# Altium PCB MB1189.PcbDoc (part 1 of 3)
Units mil, origin at the board's own origin, x right, y up, seen from the top; angles counter-clockwise.
Board outline 3826.77 x 2234.25 mil, 6 copper layers (Top Layer, GND_TOP, Internal Signal 1, VCC, Internal Signal 2, Bottom Layer), stack 62.65 mil thick; 150 components, 157 nets, 740 pads, 457 vias.
Unrouted connection lines stored in the file: 6.
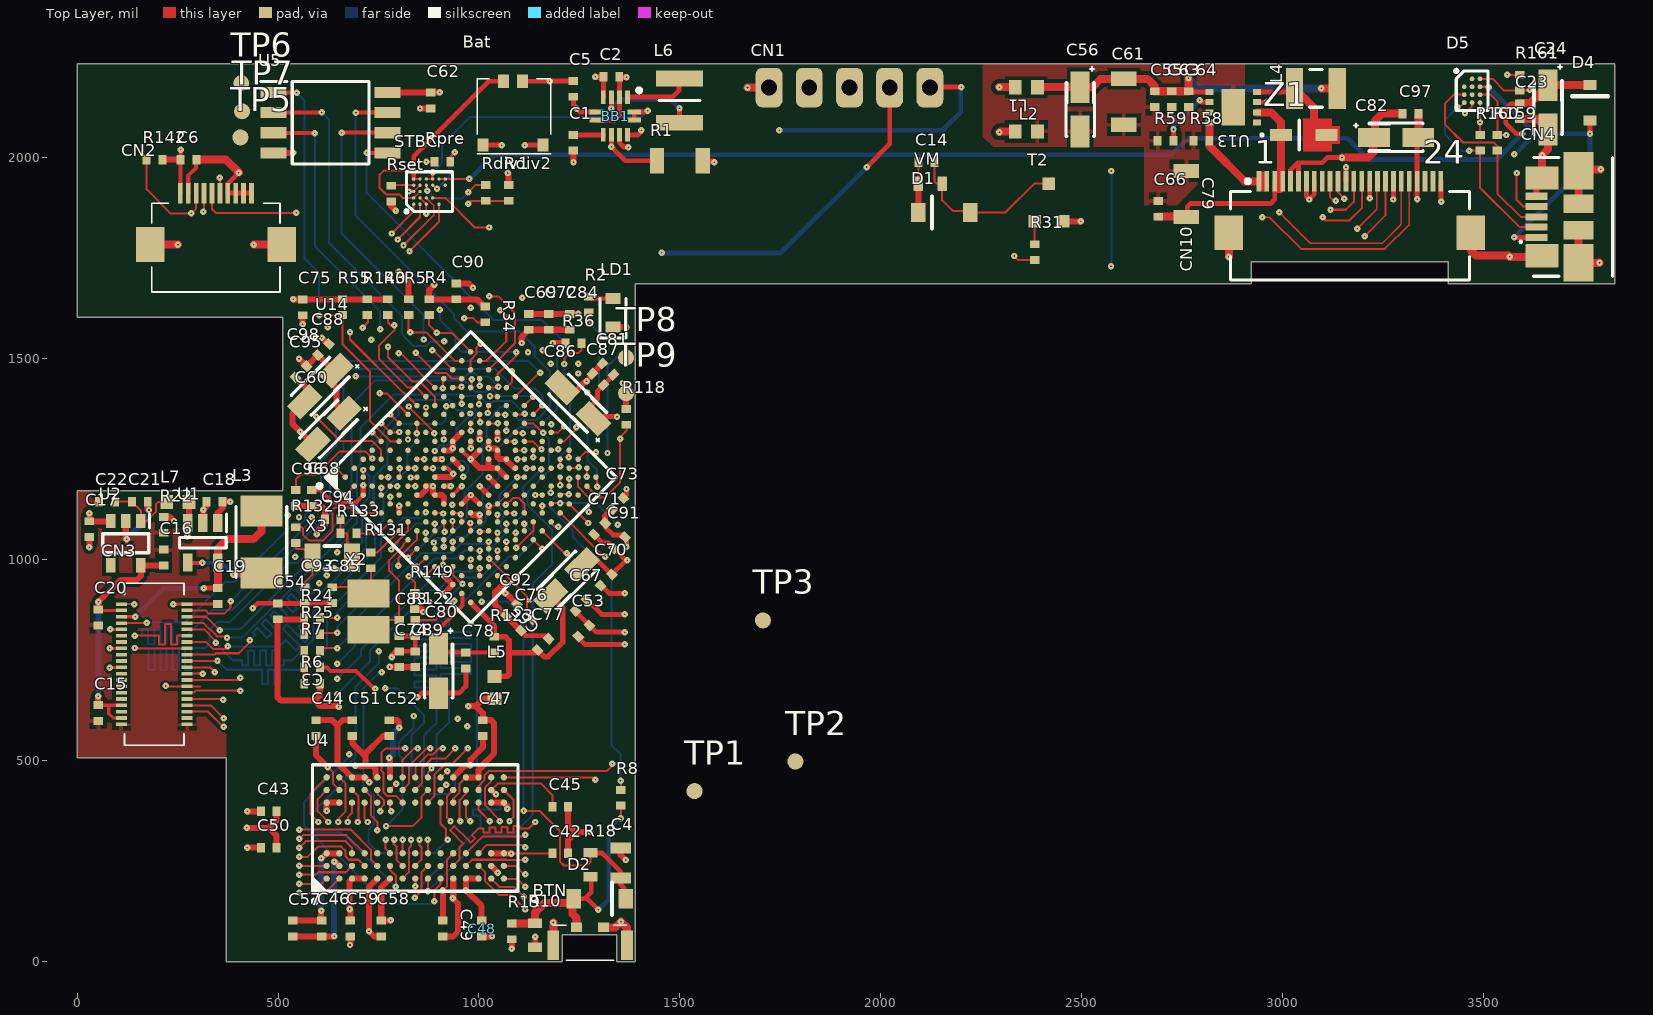
[diagram p0: Top Layer view]
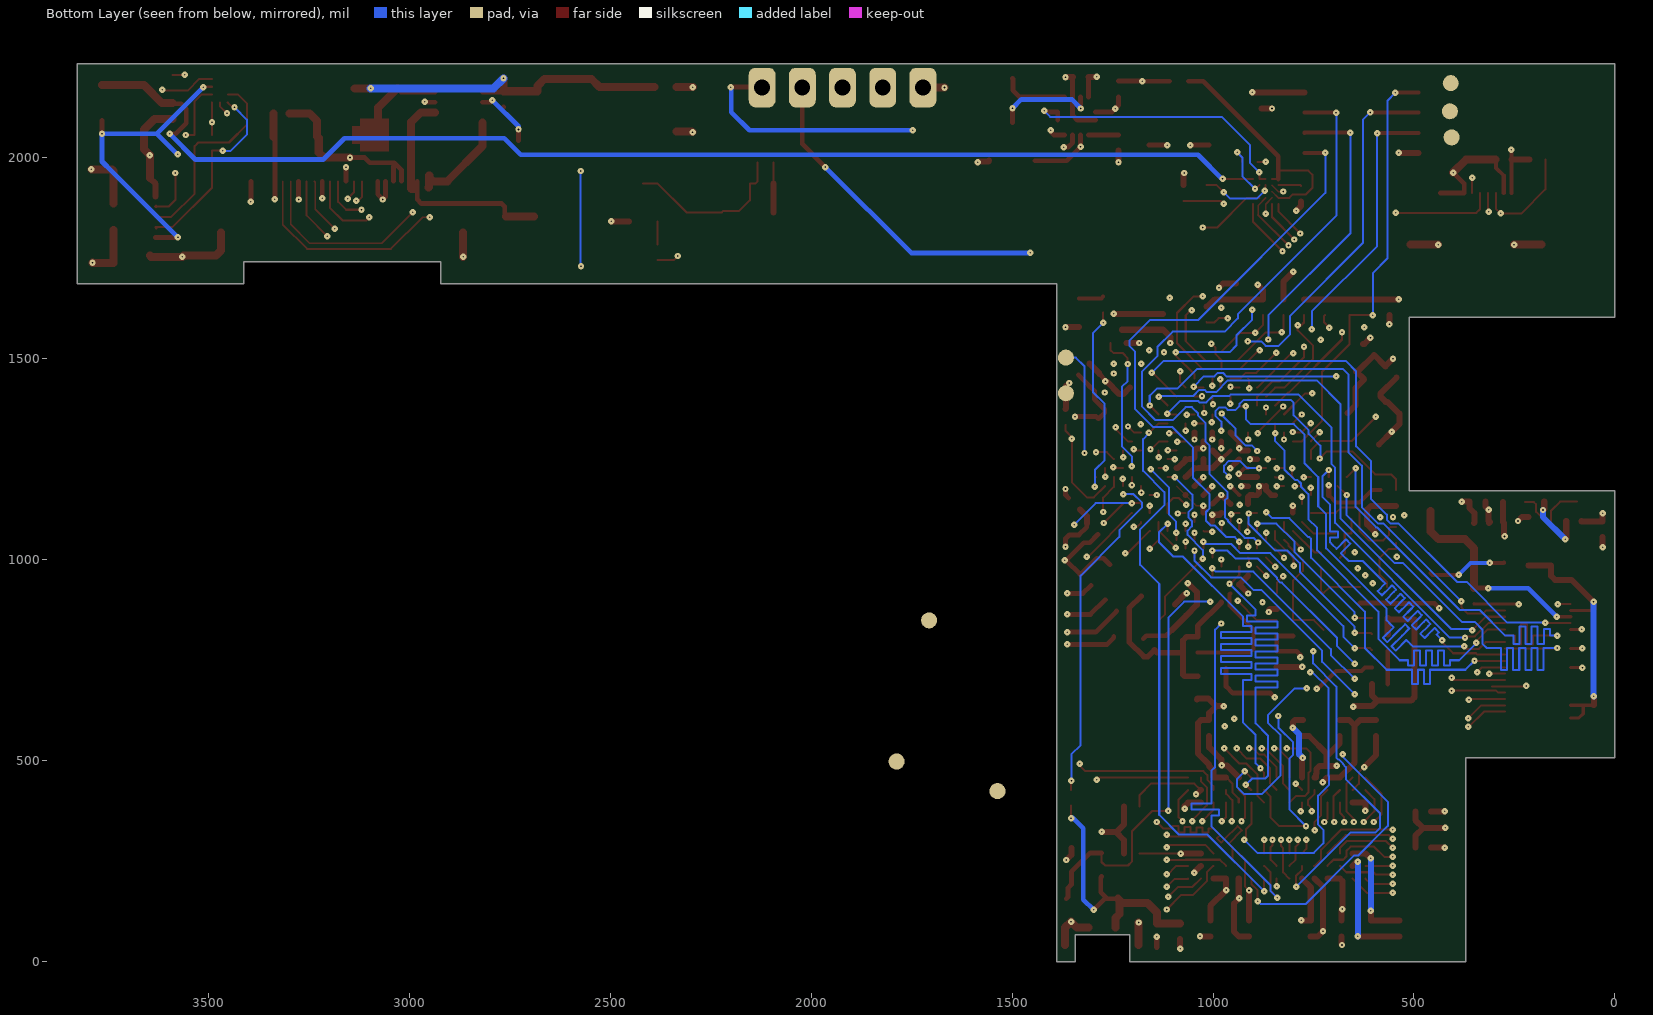
[diagram p1: Bottom Layer view, seen from below]
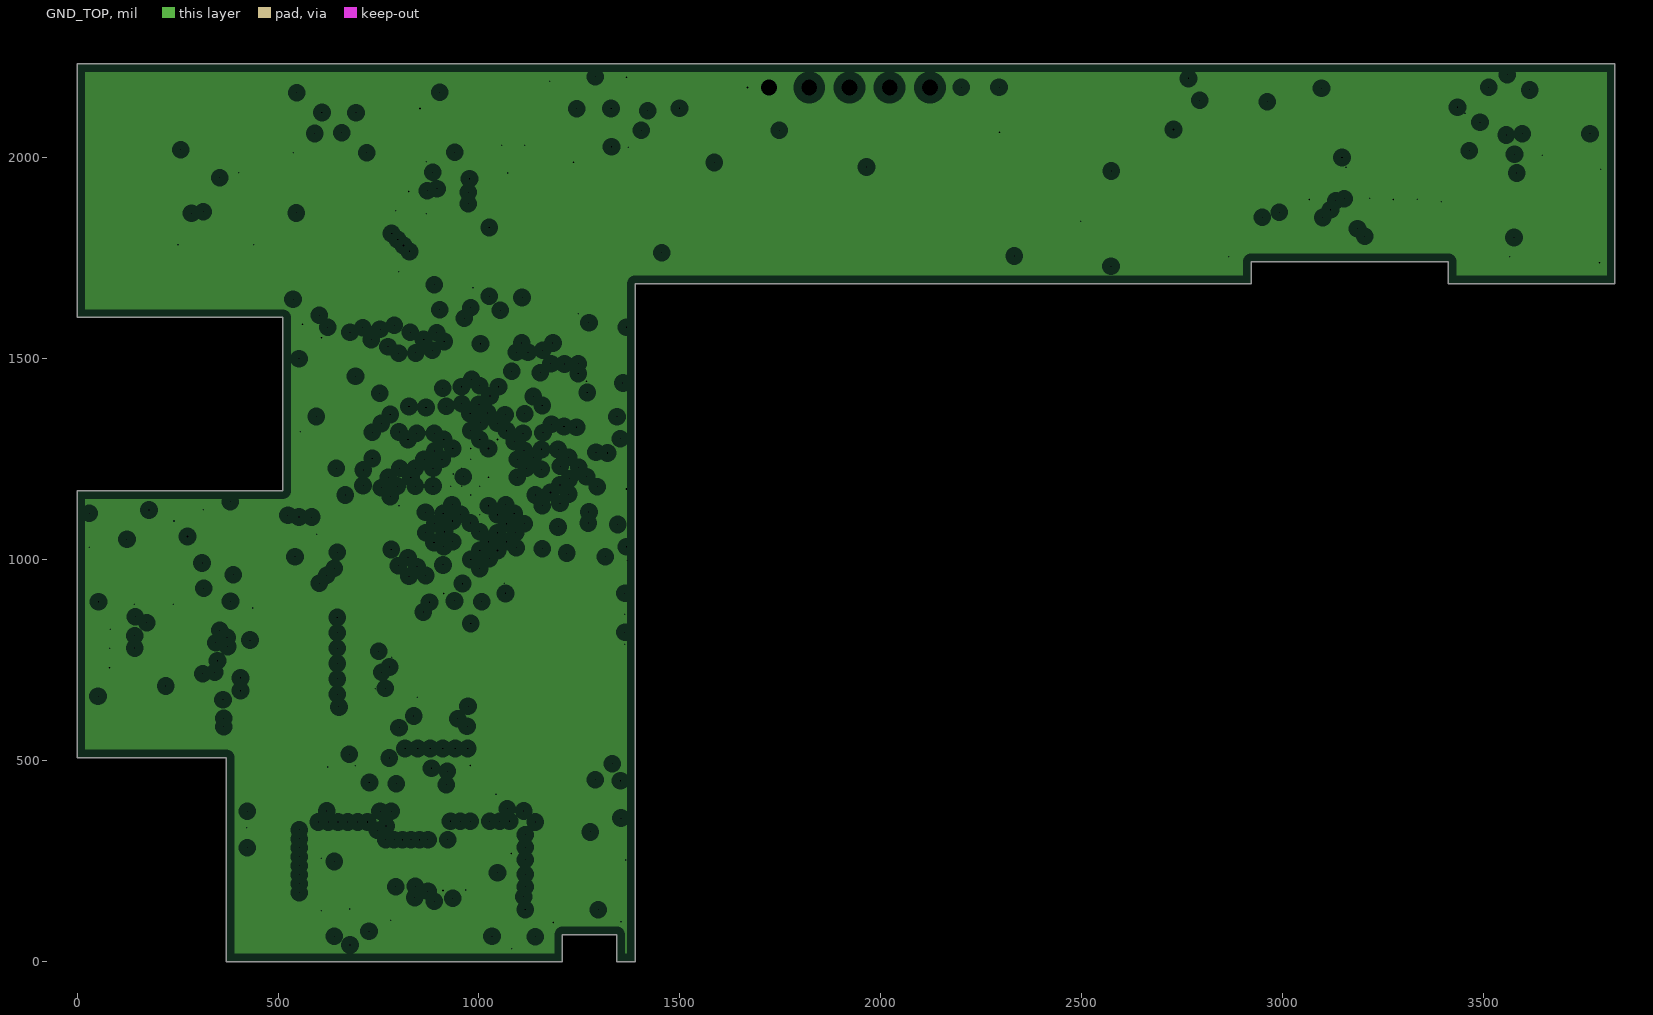
[diagram p2: GND_TOP, clearances drawn from the general rule]
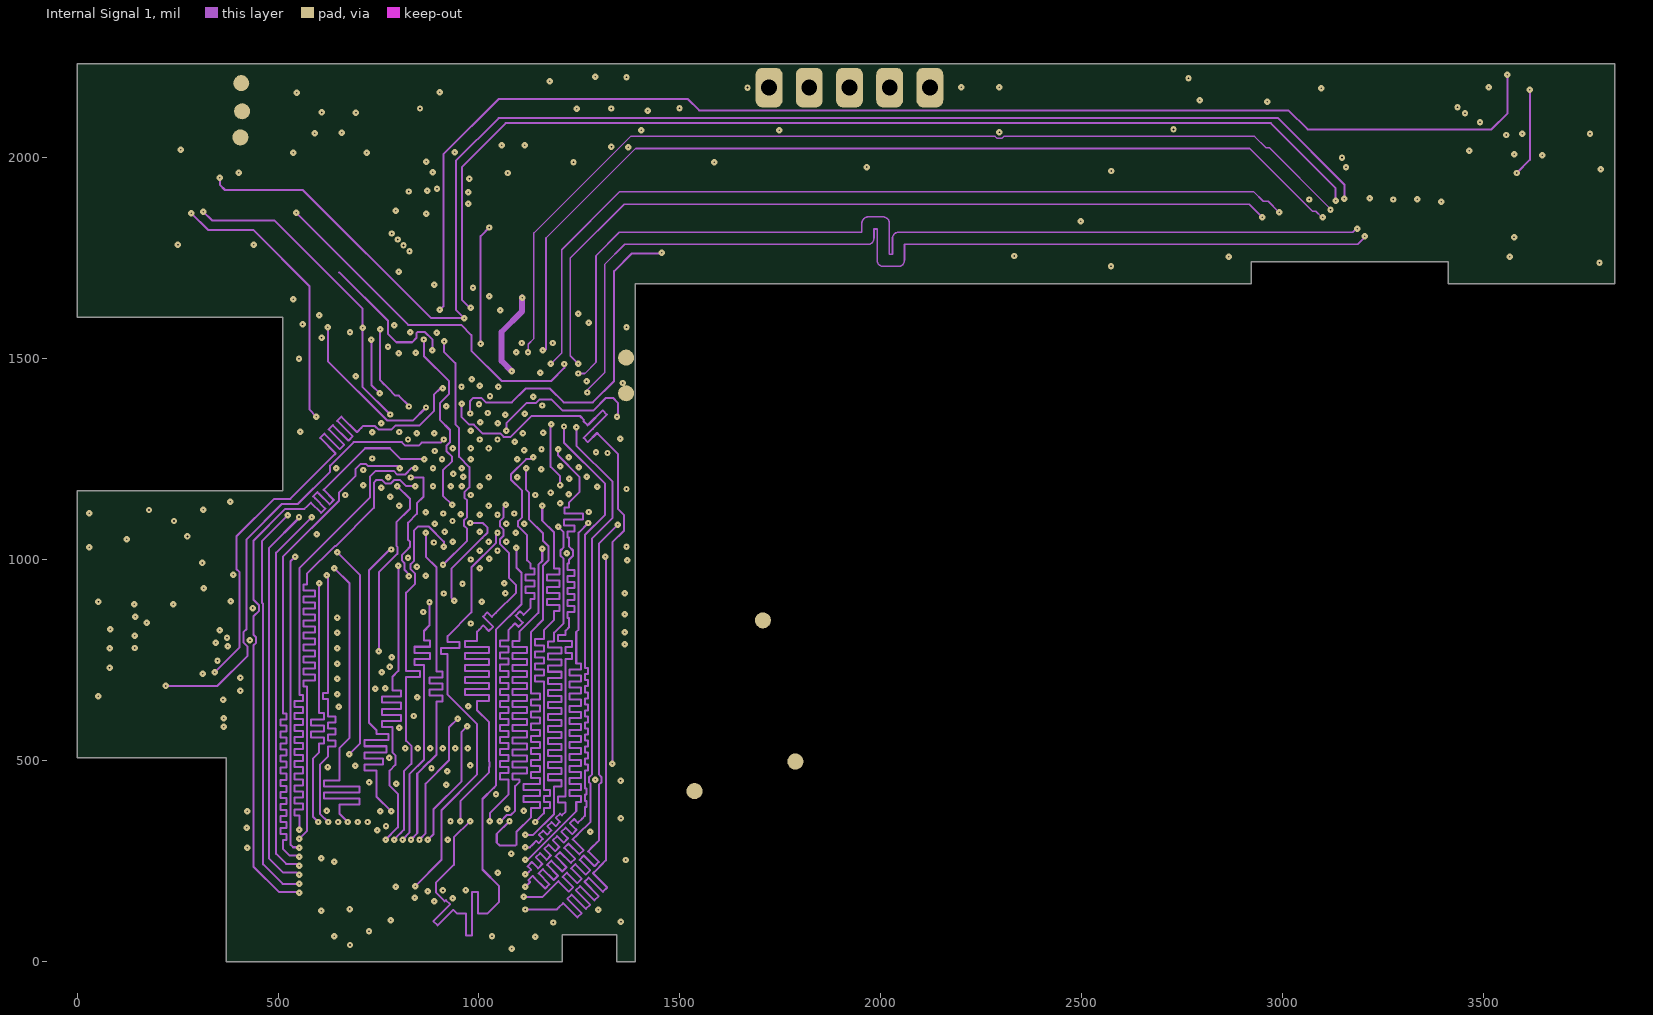
[diagram p3: Internal Signal 1]
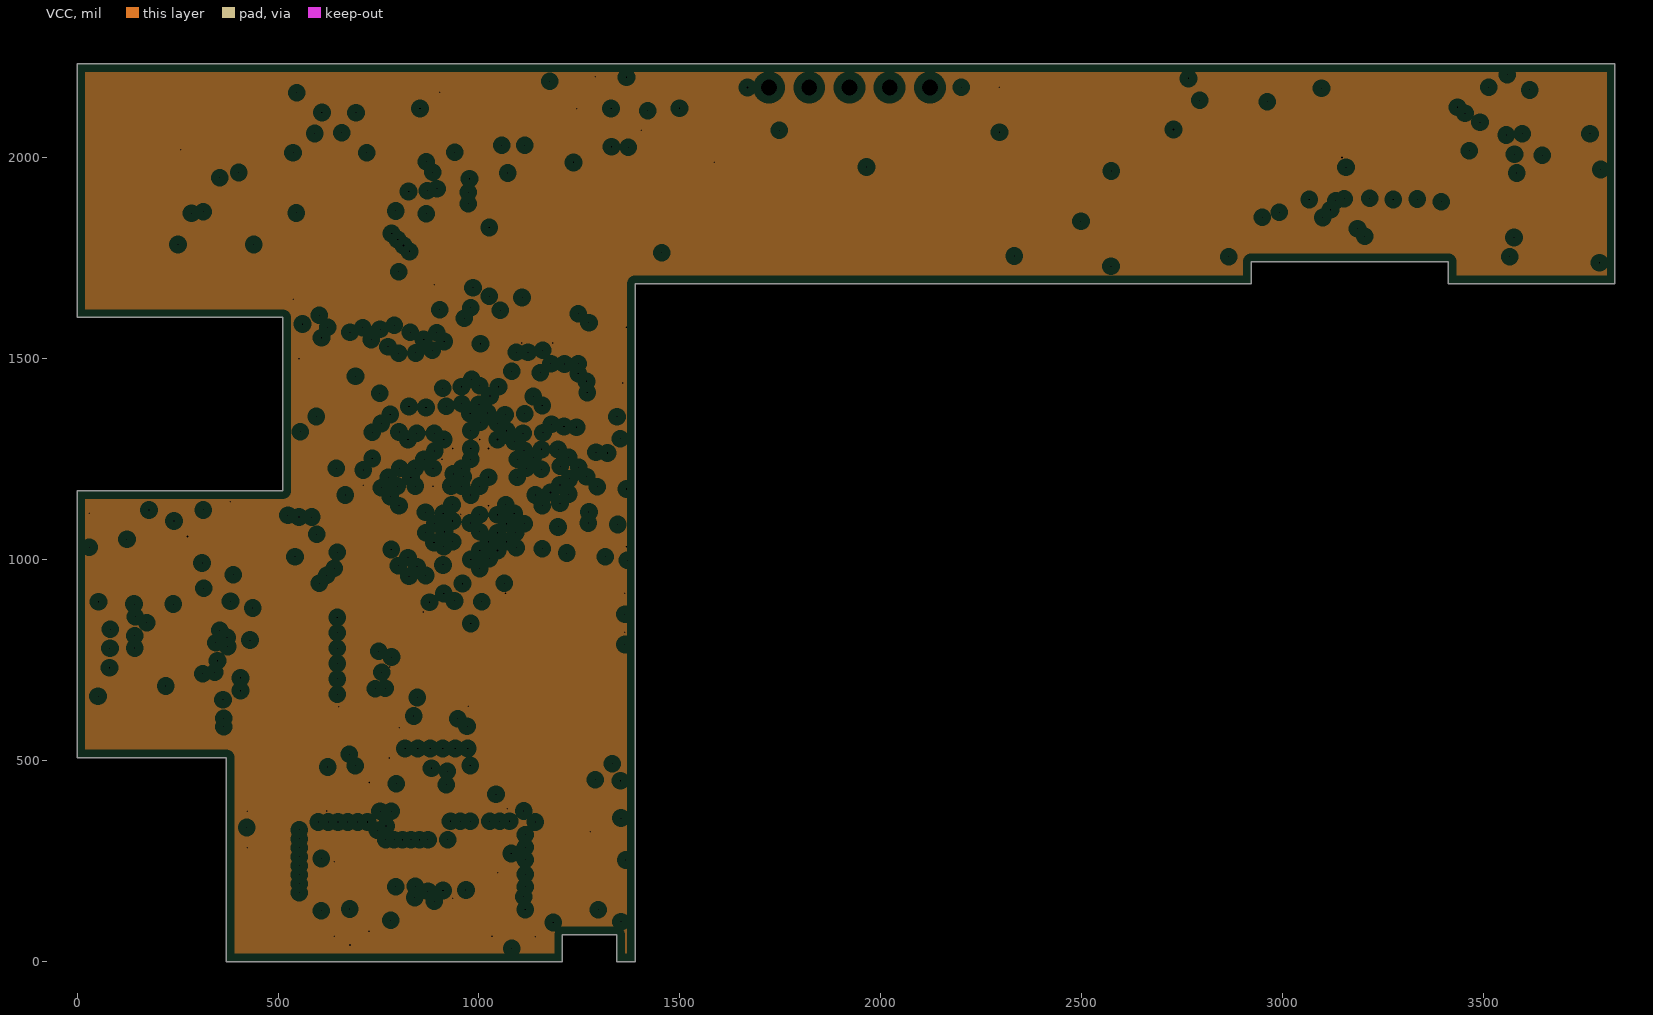
[diagram p4: VCC, clearances drawn from the general rule]
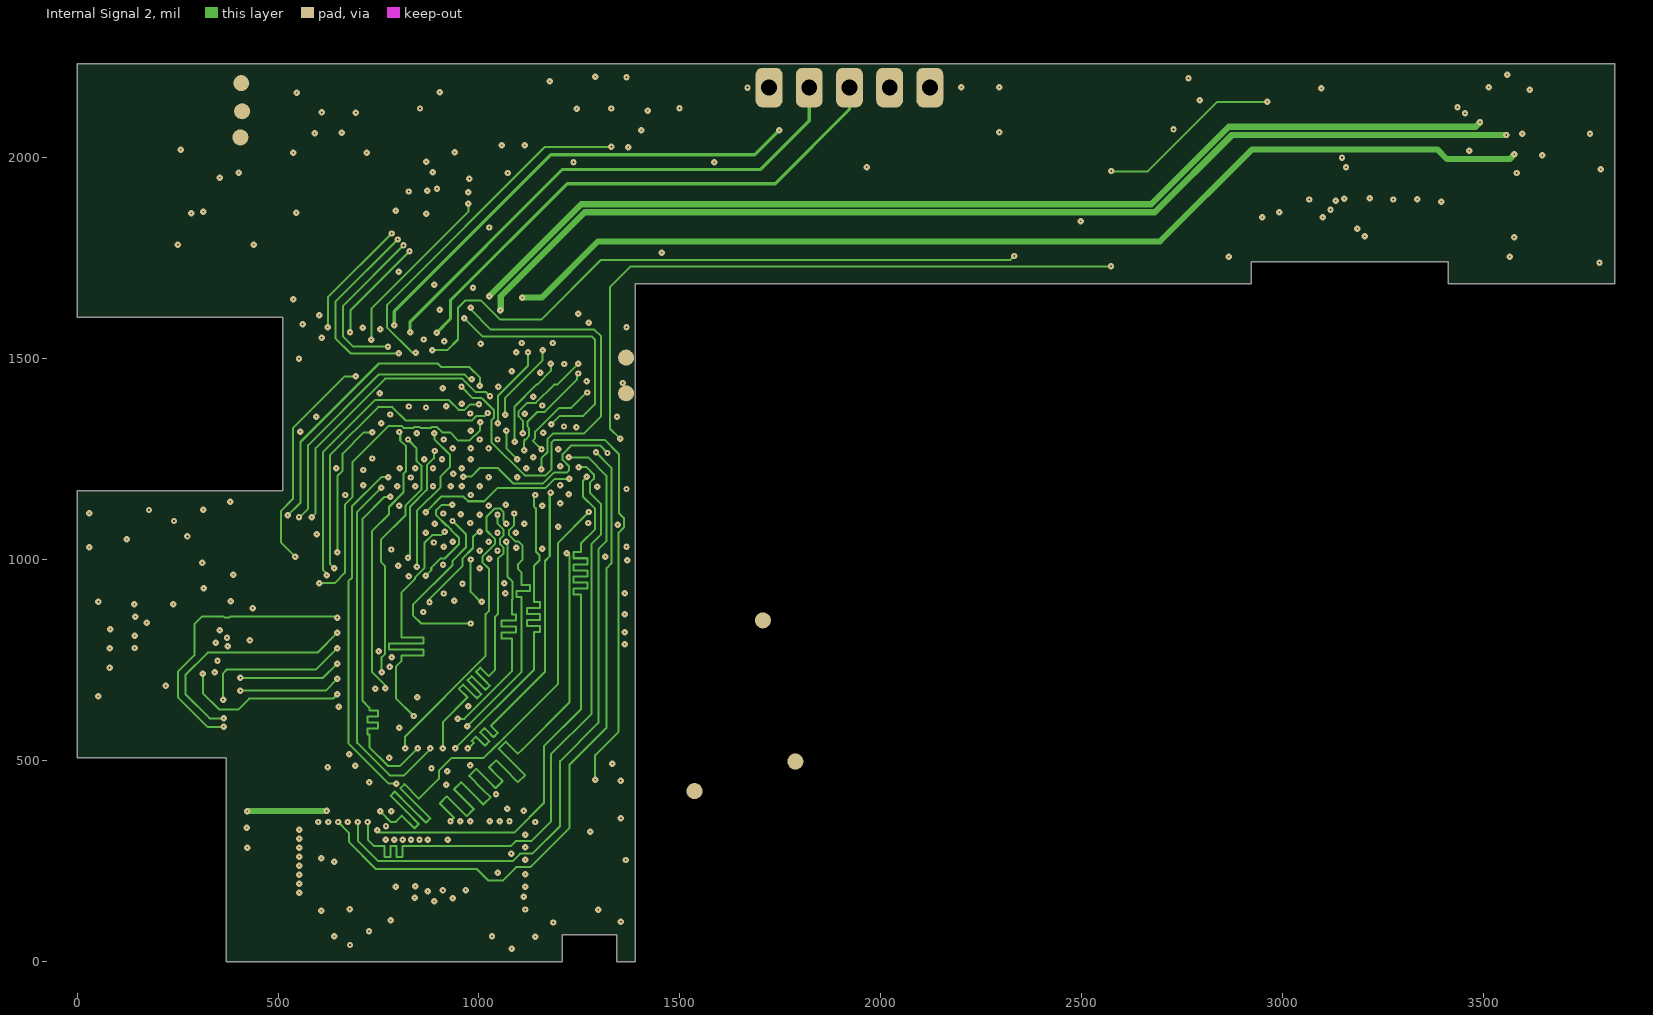
[diagram p5: Internal Signal 2]
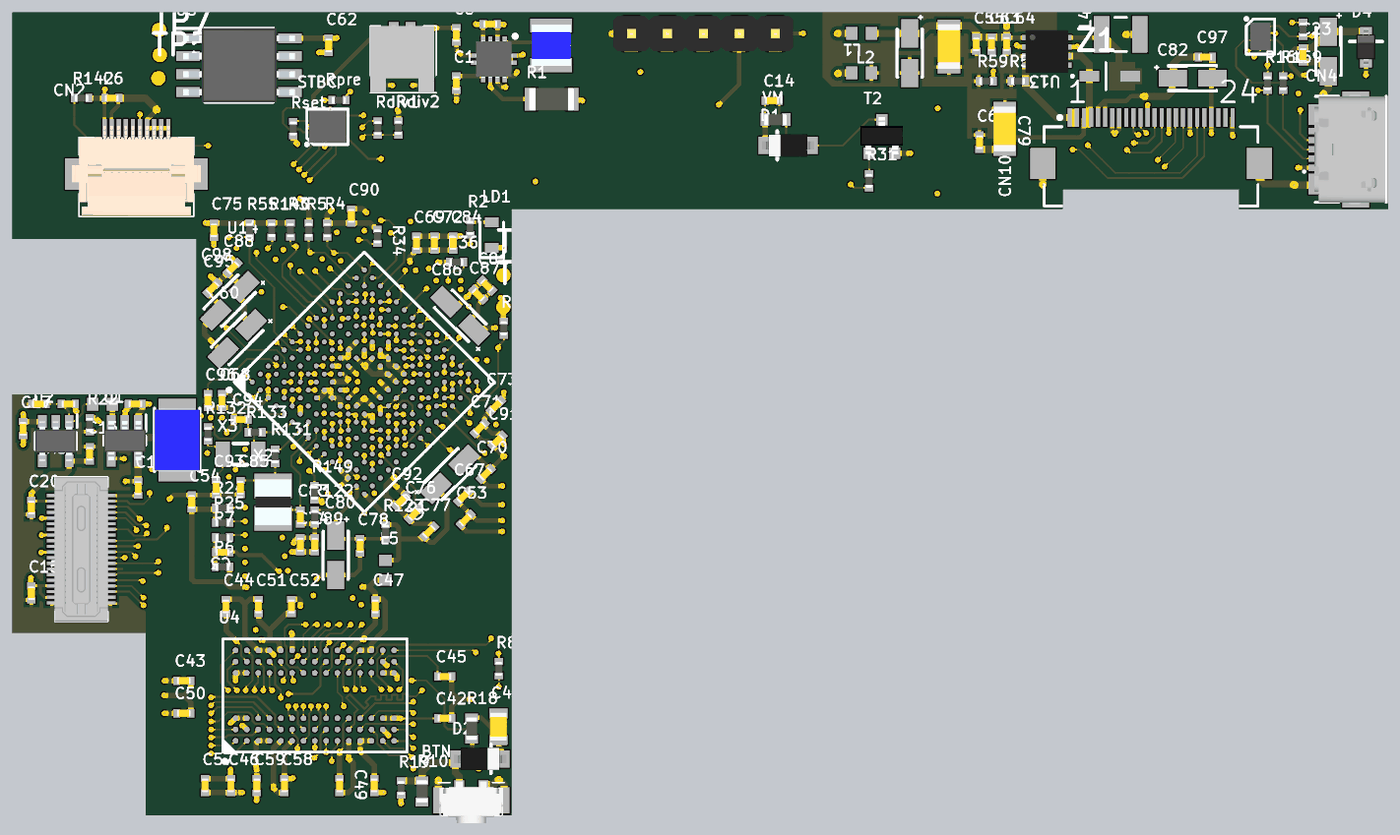
[diagram p8: 3D render of the assembled board from above, using the file's embedded part models]

## Layer stack, top to bottom
Top Solder: solder mask 0.4, Solder Resist, Dk 3.5
Top Layer: signal copper 0.685
Dielectric 1: prepreg 3.9, Dk 4.2
GND_TOP: plane copper 1.37, net GND
Dielectric 2: core 4, FR-4, Dk 4.2
Internal Signal 1: signal copper 1.37
Dielectric 3: prepreg 40, FR-4, Dk 4.2
VCC: plane copper 1.37, net +3V3
Dielectric 4: core 4, FR-4, Dk 4.2
Internal Signal 2: signal copper 1.37
Dielectric 5: prepreg 3.9, Dk 4.2
Bottom Layer: signal copper 0.685
Bottom Solder: solder mask 0.4, Solder Resist, Dk 3.5

## Board outline
1388.78,0 1388.78,1687.01 2921.26,1687.01 2921.26,1742.13 3412.4,1742.13 3412.4,1687.01 3826.77,1687.01 3826.77,2234.25 0,2234.25 0,1603.35 511.81,1603.35 511.81,1171.26 0,1171.26 0,507.87 371.06,507.87 371.06,0 1113.19,0 1207.68,0 1207.68,66.93 1277.56,66.93 1343.5,66.93 1343.5,0

## Design rules (kind name [scope] priority, off if disabled: settings)
Clearance USBclearance [InDifferentialPairClass('USB')] p1: gap=0 except(4: Track-Track; 5: Arc-Arc Arc-Track Arc-SMDPad Arc-THPad Arc-Via Track-SMDPad Track-THPad Track-Via SMDPad-SMDPad SMDPad-THPad SMDPad-Via THPad-THPad THPad-Via Via-Via; 6: Via-Fill Via-Poly Via-Region; 10: Arc-Fill Arc-Poly Arc-Region Track-Fill Track-Poly Track-Region SMDPad-Fill SMDPad-Poly SMDPad-Region THPad-Fill THPad-Poly THPad-Region)
Clearance Clearance_5 [InNetClass('STBC')] p2: gap=0 except(3: Arc-Arc Arc-Track Arc-SMDPad Arc-THPad Arc-Via Track-Track Track-SMDPad Track-THPad Track-Via SMDPad-SMDPad SMDPad-THPad SMDPad-Via THPad-THPad THPad-Via Via-Via; 6: Via-Fill Via-Poly Via-Region; 10: Arc-Fill Arc-Poly Arc-Region Track-Fill Track-Poly Track-Region SMDPad-Fill SMDPad-Poly SMDPad-Region THPad-Fill THPad-Poly THPad-Region)
Clearance Clearance_4 [InNetClass('QSPI')] p3: gap=0 except(5: Arc-Arc Arc-Track Arc-SMDPad Arc-THPad Arc-Via Track-SMDPad Track-THPad Track-Via SMDPad-SMDPad SMDPad-THPad SMDPad-Via THPad-THPad THPad-Via Via-Via; 6: Via-Fill Via-Poly Via-Region; 10: Track-Track)
Clearance Clearance_3 [InNetClass('DSI_LCD')] p4: gap=0 except(5: Arc-Arc Arc-Track Arc-SMDPad Arc-THPad Arc-Via Track-SMDPad Track-THPad Track-Via SMDPad-SMDPad SMDPad-THPad SMDPad-Via THPad-THPad THPad-Via Via-Via; 6: Via-Fill Via-Poly Via-Region; 10: Track-Track)
Clearance Clearance_2 [(InNetClass('SDRAM') AND (OnLayer('Bottom Layer') OR OnLayer('Top Layer'))   )] p5: gap=5 except(6: Via-Fill Via-Poly Via-Region; 10: Track-Track)
Clearance Clearance_1 [(InNetClass('SDRAM') AND (OnLayer('Internal Signal 1') OR OnLayer('Internal Signal 2')) )] p6: gap=5 except(6: Via-Fill Via-Poly Via-Region; 8: Track-Track)
Clearance [All] p7: gap=0 except(5: Arc-Arc Arc-Track Arc-SMDPad Arc-THPad Arc-Via Track-Track Track-SMDPad Track-THPad Track-Via SMDPad-SMDPad SMDPad-THPad SMDPad-Via THPad-THPad THPad-Via Via-Via; 6: Via-Fill Via-Poly Via-Region; 10: Arc-Fill Arc-Poly Arc-Region Track-Fill Track-Poly Track-Region SMDPad-Fill SMDPad-Poly SMDPad-Region THPad-Fill THPad-Poly THPad-Region)
ComponentClearance [All] p1: gap=0 collisioncheckmode=3 verticalgap=0 showdistances=FALSE
DiffPairsRouting LCD [InDifferentialPairClass('LCD')] p1: maxlimit=80 minlimit=5 mostfreqgap=26 toplayer_mingap=10 toplayer_maxgap=11 toplayer_prefgap=11 toplayer_minwidth=4.3 toplayer_maxwidth=5 toplayer_prefwidth=5 midlayer1_mingap=26 midlayer1_minwidth=4 midlayer1_maxwidth=4.45 midlayer1_prefwidth=4 midlayer2_maxgap=30 midlayer2_prefgap=10 midlayer2_minwidth=4.3 midlayer2_maxwidth=5 midlayer2_prefwidth=5 bottomlayer_mingap=10 bottomlayer_maxgap=11 bottomlayer_prefgap=11 bottomlayer_minwidth=4.3 bottomlayer_maxwidth=5 bottomlayer_prefwidth=5 maxuncoupledlength=500
DiffPairsRouting USB [InDifferentialPair('MICROAB')] p2: maxlimit=13 minlimit=4 mostfreqgap=13 toplayer_mingap=5 toplayer_maxgap=12 toplayer_prefgap=9 toplayer_minwidth=4.5 toplayer_maxwidth=6 toplayer_prefwidth=5 midlayer1_mingap=13 midlayer1_minwidth=4.48 midlayer1_maxwidth=5.11 midlayer1_prefwidth=4.48 midlayer2_maxgap=5 midlayer2_prefgap=4 midlayer2_minwidth=16 midlayer2_maxwidth=16 midlayer2_prefwidth=16 bottomlayer_mingap=5 bottomlayer_maxgap=12 bottomlayer_prefgap=9 bottomlayer_minwidth=4.5 bottomlayer_maxwidth=6 bottomlayer_prefwidth=5 maxuncoupledlength=500
FanoutControl Fanout_Default [All] p5: bgadir=Out bgaviamode=Centered fanoutstyle=BGA fanoutdirection=Alternating viagrid=1 // Fanout_Default (Default Rule)
HoleSize [All] p1: absolutevalues=TRUE maxlimit=100 minlimit=6 maxpercent=80.000 minpercent=20.000
MatchedLengths flash [InNetClass('QSPI')] p1: tolerance=100 checknetsindiffpair=FALSE checkdiffpairvsdiffpair=TRUE checkxsignals=TRUE checkothers=TRUE
MatchedLengths "LCD diffpairs" [InNetClass('LCD')] p2: tolerance=100 checknetsindiffpair=FALSE checkdiffpairvsdiffpair=TRUE checkxsignals=TRUE checkothers=TRUE
MatchedLengths ADDRESS [InNetClass('A[0..15]')] p3: tolerance=125 checknetsindiffpair=FALSE checkdiffpairvsdiffpair=TRUE checkxsignals=TRUE checkothers=TRUE
MatchedLengths CAM [InNetClass('CAM')] p4: tolerance=125 checknetsindiffpair=FALSE checkdiffpairvsdiffpair=TRUE checkxsignals=TRUE checkothers=TRUE
MatchedLengths DATA [InNetClass('D[0..31]')] p5: tolerance=250 checknetsindiffpair=FALSE checkdiffpairvsdiffpair=TRUE checkxsignals=TRUE checkothers=TRUE
MatchedLengths CONTROL [InNetClass('Control')] p6: tolerance=125 checknetsindiffpair=FALSE checkdiffpairvsdiffpair=TRUE checkxsignals=TRUE checkothers=TRUE
MatchedLengths "ADDRESS + CLK" [(InNetClass('A[0..15]') AND InNetClass('CLK'))] p7: tolerance=400 checknetsindiffpair=FALSE checkdiffpairvsdiffpair=TRUE checkxsignals=TRUE checkothers=TRUE
MatchedLengths "DATA + CLK" [(InNetClass('D[0..31]') AND InNetClass('CLK'))] p8: tolerance=500 checknetsindiffpair=FALSE checkdiffpairvsdiffpair=TRUE checkxsignals=TRUE checkothers=TRUE
MatchedLengths "CONTROL+ CLK" [(InNetClass('COntrol') AND InNetClass('CLK'))] p9: tolerance=400 checknetsindiffpair=FALSE checkdiffpairvsdiffpair=TRUE checkxsignals=TRUE checkothers=TRUE
MatchedLengths [InNetClass('CAM_DATA')] p10: tolerance=250 checknetsindiffpair=FALSE checkdiffpairvsdiffpair=TRUE checkxsignals=TRUE checkothers=TRUE
MinimumAnnularRing [All] p1: minimumring=6
PlaneClearance [All] p1: clearance=20
PlaneConnect [All] p1: planeconnectstyle=Relief reliefexpansion=20 reliefentries=4 reliefconductorwidth=10 reliefairgap=10
PolygonConnect [All] p1: connectstyle=Relief reliefconductorwidth=10 reliefentries=4 polygonreliefangle="90 Angle" airgapwidth=10
RoutingTopology [All] p1: topology=Daisy_Balanced
RoutingVias [All] p1: holewidth=4 width=16 viastyle="Through Hole" minholewidth=4 minwidth=16 maxholewidth=15 maxwidth=30
SolderMaskExpansion [All] p1: expansion=4
ViasUnderSMD [All] p1: allowed=FALSE
Width Diff [InDifferentialPairClass('HSSI')] p1: maxlimit=16.85 minlimit=3.53 preferedwidth=14.36 toplayer_minwidth=4.65 toplayer_maxwidth=6.59 toplayer_prefwidth=5.55 midlayer1_maxwidth=5.11 midlayer1_prefwidth=4.27 midlayer2_minwidth=3.93 midlayer2_maxwidth=5.93 midlayer2_prefwidth=4.86 bottomlayer_minwidth=12.22 impedancedriven=TRUE minimp=45.000000 maximp=55.000000 favimp=50.000000
Width QSPI [InNetClass('QSPI')] p2: maxlimit=10 minlimit=5 preferedwidth=5 toplayer_prefwidth=10 minimp=50.000000 maximp=50.000000 favimp=50.000000
Width WidthPower [(InNet('+3V3_ST_LINK') OR InNet('+2.8V') OR InNet('GND') OR InNet('+1.2V') OR InNet('AGND') OR InNet('+3V3') OR InNet('BLGND') OR InNet('VIN') OR InNet('VDDA') OR InNet('VUSB_ST_LINK')OR InNet('VUSB'))] p3: maxlimit=20 minlimit=4 preferedwidth=15 midlayer1_minwidth=5 midlayer2_minwidth=5 bottomlayer_minwidth=5 minimp=50.000000 maximp=50.000000 favimp=50.000000
Width [All] p4: maxlimit=20 minlimit=3 preferedwidth=5 minimp=90.000000 maximp=110.000000 favimp=100.000000
23 further rules are at their usual default settings.

## Classes and differential pairs
differential pair class USB: MICROAB
net class LCD: DSI_CK_N DSI_CK_P DSI_D0_N DSI_D0_P DSI_D1_N DSI_D1_P
component class USB: CN4 D5 LD8 LD9 R153 R154 R155 R158 R159 R160 R161 T3
component class U_DSI_LCD: C6 C55 C56 C61 C63 C64 C66 C79 C82 C97 CN2 CN10 L1 L2 L4 R34 R36 R58 R59 R118 SB13 U13 Z1 ZZ1
component class U_MCU: C53 C54 C60 C65 C67 C68 C69 C70 C71 C72 C73 C74 C75 C76 C77 C78 C80 C81 C83 C84 C85 C86 C87 C88 C89 C90 C91 C92 C93 C94 C95 C96 C98 L5 R24 R25 R122 R123 R131 R132 R133 R140 R142 R149 SB6 SB7 SB14 SB15 SB19 TP1 TP8 TP9 U14 X2 X3
component class U_Memory: C42 C43 C44 C45 C46 C47 C48 C49 C50 C51 C52 C57 C58 C59 TP2 TP3 U4
component class U_Peripherals: B2 BTN C3 C4 C14 C15 C16 C17 C18 C19 C20 C21 C22 C? CN1 CN3 CN9 CN11 D1 D2 L3 L7 LD1 R2 R3 R4 R5 R6 R7 R8 R10 R18 R19 R22 R31 R? T2 U1 U2 VM
component class U_Power: Bat BB1 C1 C2 C5 C23 C24 D4 JP1 L6 R1 Rdiv1 Rdiv2 Rpre Rset STBC
component class U_QSPI: C62 R55 TP5 TP6 TP7 U5
net class A[0..15]: A0 A1 A2 A3 A4 A5 A6 A7 A8 A9 A10 A11 A14 A15
net class D[0..31]: D0 D1 D2 D3 D4 D5 D6 D7 D8 D9 D10 D11 D12 D13 D14 D15 D16 D17 D18 D19 D20 D21 D22 D23 D24 D25 D26 D27 D28 D29 D30 D31
differential pair class LCD: DSI_CK DSI_D0 DSI_D1
net class Control: PC0 PF11 PG15 PH2 PH3
net class CLK: NetTP3_1
net class Cam: Y0 Y1 Y2 Y3 Y4 Y5 Y6 Y7 Y8 Y9
net class QSPI: PB6 PF6 PF7 PF8 PF9 PF10
differential pair MICROAB: +MICROAB_P -MICROAB_N
differential pair DSI_D1: +DSI_D1_P -DSI_D1_N
differential pair DSI_D0: +DSI_D0_P -DSI_D0_N
differential pair DSI_CK: +DSI_CK_P -DSI_CK_N

## Components (designator, comment, footprint, x,y, rotation, side; value= is the part's Value field where it differs from the comment)
Bat "202656-0021" 2026560021 1084.65,2109.25 r0 top
BB1 "TPS63051RMWT" QFN50P250X250X100-12N-D 1339.57,2104.33 r270 top
BTN "SKSLLBE010" SKSLLBE010 1276.57,47.24 r0 top
C1 "1nF" "CAP - 0402" 1235.24,2057.09 r270 top
C2 "10uF" "CAP - 0402" 1310.04,2201.77 r0 top
C3 "100 nF" "CAP - 0402" 565.64,732.03 r0 top
C4 "10uF" "CAP - 0805" 1353.35,283.46 r270 top
C5 "100nF" "CAP - 0402" 1235.24,2152.56 r90 top
C6 "100nF" "CAP - 0402" 296.26,1996.06 r180 top
C14 "100nF" "CAP - 0402" 2132.87,1989.17 r180 top
C15 "100nF" "CAP - 0402" 53.15,637.8 r270 top
C16 "100nF" "CAP - 0402" 215.55,986.22 r90 top
C17 "100nF" "CAP - 0402" 30.51,1095.47 r270 top
C18 "4.7 uF" "CAP - 0402" 322.83,1144.69 r0 top
C19 "10 uF" "CAP - 0402" 350.39,890.75 r90 top
C20 "1uF" "CAP - 0402" 53.15,875.98 r270 top
C21 "100nF" "CAP - 0402" 136.81,1144.69 r0 top
C22 "10uF" "CAP - 0402" 93.5,1144.69 r180 top
C23 "10uF" "CAP - 0402" 3589.57,2135.83 r270 top
C24 "10uF" A 3660.43,2125.98 r270 top
C42 "100nF" "CAP - 0402" 1221.7,269.68 r180 top
C43 "100nF" "CAP - 0402" 457.68,374.02 r0 top
C44 "100nF" "CAP - 0402" 594.49,600.39 r270 top
C45 "100nF" "CAP - 0402" 1221.7,385.83 r180 top
C46 "100nF" "CAP - 0402" 608.27,62.99 r90 top
C47 "100nF" "CAP - 0402" 1009.84,600.39 r270 top
C48 "100nF" "CAP - 0402" 1006.89,62.99 r90 top
C49 "100nF" "CAP - 0402" 910.43,62.99 r90 top
C50 "100nF" "CAP - 0402" 457.68,283.46 r0 top
C51 "100nF" "CAP - 0402" 685.04,600.39 r270 top
C52 "100nF" "CAP - 0402" 776.57,600.39 r270 top
C53 "100nF" "CAP - 0402" 1274.61,836.61 r225 top
C54 "100nF" "CAP - 0402" 499.02,852.36 r90 top
C55 "100nF" "CAP - 0402" 2681.1,2165.6 r270 top
C56 "10uF" A 2496.06,2121.06 r270 top
C57 "100nF" "CAP - 0402" 536.42,62.99 r90 top
C58 "100nF" "CAP - 0402" 756.89,62.99 r90 top
C59 "100nF" "CAP - 0402" 680.12,62.99 r90 top
C60 "4.7uF" A 625.98,1325.79 r225 top
C61 "4.7uF/10V" "CAP - 1206" 2604.33,2195.87 r270 top
C62 "100nF" "CAP - 0402" 879.92,2162.4 r270 top
C63 "10nF" "CAP - 0402" 2723.43,2126.97 r90 top
C64 "100nF" "CAP - 0402" 2765.75,2126.97 r90 top
C65 "1uF" A 1217.52,948.82 r45 top
C66 "10nF" "CAP - 0402" 2689.96,1892.72 r270 top
C67 "100nF" "CAP - 0402" 1240.16,873.03 r45 top
C68 "100nF" "CAP - 0402" 583.66,1173.23 r270 top
C69 "100nF" "CAP - 0402" 1124.02,1572.83 r90 top
C70 "100nF" "CAP - 0402" 1303.15,936.02 r45 top
C71 "100nF" "CAP - 0402" 1313.98,1090.55 r225 top
C72 "100nF" "CAP - 0402" 1174.21,1572.83 r90 top
C73 "100nF" "CAP - 0402" 1331.69,1125.98 r45 top
C74 "100nF" "CAP - 0402" 801.18,733.27 r90 top
C75 "100nF" "CAP - 0402" 561.02,1647.64 r270 top
C76 "2.2uF" "CAP - 0402" 1131.89,851.38 r225 top
C77 "100nF" "CAP - 0402" 1173.23,803.15 r225 top
C78 "100nF" "CAP - 0402" 967.52,730.32 r90 top
C79 "4.7uF/50V" "CAP - 1206" 2760.83,1854.33 r90 top
C80 "1uF" A 899.61,723.43 r270 top
C81 "2.2uF" "CAP - 0402" 1334.65,1460.63 r135 top
C82 "4.7uF" A 3282.48,2051.18 r0 top
C83 "8.2pF" "CAP - 0402" 801.18,849.41 r270 top
C84 "100nF" "CAP - 0402" 1226.38,1572.83 r90 top
C85 "8.2pF" "CAP - 0402" 634.84,931.35 r270 top
C86 "1uF" A 1246.06,1389.76 r135 top
C87 "100nF" "CAP - 0402" 1282.48,1462.6 r315 top
C88 "100nF" "CAP - 0402" 599.41,1509.84 r45 top
C89 "100nF" "CAP - 0402" 841.54,733.27 r90 top
C90 "100nF" "CAP - 0402" 942.91,1648.62 r90 top
C91 "100nF" "CAP - 0402" 1363.19,1056.1 r225 top
C92 "100nF" "CAP - 0402" 1094.49,888.78 r225 top
C93 "3.0pF" "CAP - 0402" 566.93,931.35 r270 top
C94 "3.0pF" "CAP - 0402" 655.51,1101.38 r180 top
C95 "100nF" "CAP - 0402" 570.87,1481.3 r225 top
C96 "2.2uF" "CAP - 0402" 544.29,1173.23 r270 top
C97 "100nF" "CAP - 0402" 3337.6,2110.24 r180 top
C98 "4.7uF" A 605.31,1432.09 r225 top
CN1 "Pin header 5p" "PIN HEADER 5P 2.54mm" 2122.05,2175.2 r180 top
CN2 "FH12-10S-0.5SH(1)(98)" FH1210S05SH198 345.47,1802.17 r0 top locked
CN3 "DF30FC-40DS-0.4V(82)" DF30FC40DS04V82 191.93,740.16 r90 top locked
CN4 "47346-1001" 47346-0001 3820.87,1853.35 r270 top locked
CN10 "CL586-0521-0" FH12-24S-0.5SH 3167.32,1877.95 r0 top locked
D1 "Diode" SOD123 2222.44,1864.17 r180 top
D2 "Diode" SOD123 1236.22,156.5 r0 top
D4 "BAT60JFILM" SOD323 3764.76,2093.5 r90 top
D5 "EMIF02-USB03F2" BGA11C50P3X4_144X194X72 3471.46,2167.32 r0 top
L1 "BEAD(BK1608HS600-T)" 1608[0603] 2362.2,2176.18 r0 top
L2 "BEAD(BK1608HS600-T)" 1608[0603] 2362.2,2065.94 r0 top
L3 "2.2 uH" INDPM4532X280N 458.66,1044.29 r90 top
L4 "LQH32PH4R7NN0L" C1210_L 3082.68,2173.23 r180 top
L5 "BEAD(FCM1608KF-601T03)" 1608[0603] 1038.39,682.09 r90 top
L6 "1269AS-H-1R5M=P2" INDC2928X203N 1499.02,2142.72 r90 top
L7 "BEAD(BK1608HS600-T)" 1608[0603] 250.98,1143.7 r0 top
LD1 "Green" LEDC1608X55N 1333.66,1615.16 r90 top
R1 "1M" "RES - 1206" 1557.09,1993.11 r180 top
R2 "510" "RES - 0402" 1273.62,1615.16 r90 top
R3 "4K7" "RES - 0402" 773.62,1608.63 r90 top
R4 "4K7" "RES - 0402" 875.98,1608.63 r90 top
R5 "47K" "RES - 0402" 824.81,1648.62 r270 top
R6 "4K7" "RES - 0402" 564.96,690.94 r0 top
R7 "0R" "RES - 0402" 604.95,773.12 r180 top
R8 "10" "RES - 0402" 1353.35,387.8 r90 top
R10 "100" "RES - 0603" 1139.76,95.47 r270 top
R18 "470K" "RES - 0603" 1277.56,211.61 r90 top
R19 "220K" "RES - 0402" 1081.69,95.47 r270 top
R22 "0R" "RES - 0402" 215.55,1066.93 r90 top
R24 "4K7" "RES - 0402" 564.96,855.31 r0 top
R25 "4K7" "RES - 0402" 564.96,814.22 r0 top
R31 "1K" "RES - 0402" 2382.87,1785.43 r270 top
R34 "100K" "RES - 0402" 1015.75,1630.91 r270 top
R36 "4K7" "RES - 0402" 1215.55,1539.37 r0 top
R55 "10K" "RES - 0402" 660.43,1608.63 r90 top
R58 "10" "RES - 0402" 2777.56,2043.31 r0 top
R59 "100K" "RES - 0402" 2728.35,2043.3 r180 top
R118 "4K7" "RES - 0402" 1367.13,1335.63 r90 top
R122 "10K" "RES - 0402" 841.54,810.04 r90 top
R123 "0" "RES - 0402" 1038.39,808.75 r270 top
R131 "0" "RES - 0402" 731.3,1018.7 r270 top
R132 "0" "RES - 0402" 544.29,1041.34 r90 top
R133 "0" "RES - 0402" 655.51,1065.94 r0 top
R140 "1K5" "RES - 0402" 721.46,1648.62 r270 top
R142 "1K5" "RES - 0402" 212.6,1996.06 r180 top
R149 "10K" "RES - 0402" 840.55,917.32 r270 top
R159 "22" "RES - 0402" 3534.45,2017.72 r90 top
R160 "22" "RES - 0402" 3491.14,2017.72 r90 top
R161 "0" "RES - 0402" 3589.57,2167.32 r90 top
Rdiv1 "100k" "RES - 0402" 1016.73,1893.08 r90 top
Rdiv2 "200K" "RES - 0402" 1073.82,1933.07 r270 top
Rpre "1K" "RES - 0402" 888.78,1990.16 r0 top
Rset "430 Ohm" "RES - 0402" 781.5,1931.1 r270 top
STBC "STBC03JR" BGA30C40P5X6_225X259X60 876.97,1916.34 r90 top
T2 "BC817" SOT23 2418.31,1931.1 r0 top
TP1 "TP" "PIN HEADER 1p" 1536.42,424.21 r0 top
TP2 "TP" "PIN HEADER 1p" 1787.4,498.03 r90 top
TP3 "TP" "PIN HEADER 1p" 1706.69,849.41 r90 top
TP5 "TP" "PIN HEADER 1p" 406.5,2051.18 r90 top
TP6 "TP" "PIN HEADER 1p" 408.46,2186.02 r90 top
TP7 "TP" "PIN HEADER 1p" 410.43,2116.14 r90 top
TP8 "BOOT0" "PIN HEADER 1p" 1366.14,1502.95 r90 top
TP9 "+3V3" "PIN HEADER 1p" 1366.14,1414.37 r90 top
U1 "LM3671MF-1.5_NOPB" SOT95P280X145-5N 312.99,1042.32 r270 top
U2 "AP7365-28WG-7DICT-ND" SOT95P280X120-5N 121.06,1041.34 r270 top
U4 "MICRON MT48LC4M32B2B5-6A" MICT-B5-90 841.54,332.68 r90 top locked
U5 "MX25L12835FM2I-10G" SOIC127P790X216-8N 630.91,2087.6 r0 top
U13 "STLD40DPUR" QFN-8 2876.97,2125.98 r180 top
U14 "STM32F469NIH6" STM-TFBGA216 979.33,1205.71 r45 top locked
VM "Pin header 2p" "RES - 0603" 2093.5,1936.02 r0 top
X2 "NX3225GD-8.00M" RESC3226X100N 725.39,871.06 r90 top
X3 "NX3215SA-32.768K" NX3215SA 634.84,1004.92 r0 top
Z1 "STPS1L40M" DO-216AA 3116.14,2057.09 r180 top

## Footprints (in the part's own frame and the unit in brackets; to place one, negate y for a bottom-side part, rotate by r counter-clockwise, add the part's x,y. Pads: shape width x height; smd on the part's side, far side on the other; paste and mask are expansions set on the pad)
1608[0603] [mm] "Chip Capacitor, Body 1.6x0.8mm, IPC High Density"
  rect 0.8x0.9 smd: 1(-0.7,0) 2(0.7,0)
  body extent -0.87,-0.48 0.87,0.48, height 1.3
47346-0001 [mm]
  rect 0.45x1.38 smd: 1(1.3,-4.81) 2(0.65,-4.81) 3(0,-4.81) 4(-0.65,-4.81) 5(-1.3,-4.81)
  rect 1.475x2.1 smd: 6(-2.452,-4.45) 7(2.452,-4.45)
  rect 1.175x1.9 smd: 8(0.837,-2.15) 9(-0.837,-2.15)
  rect 2.375x1.9 smd: 10(2.913,-2.15) 11(-2.913,-2.15)
  silkscreen extent -3.75,-5.84 3.75,0, body extent -3.9,-5.06 3.9,-0.06, height 2.7
2026560021 [mm]
  rect 0.7x0.85 smd: 1(-0.6,2.072) 2(0.6,2.072)
  rect 0.7x0.8 smd: 3(-1.9,-1.953) 4(1.9,-1.953)
  silkscreen extent -2.25,-2.5 2.4,2.22, body extent -2.25,-2.5 2.25,2.29, height 1.17
A [mm] "Capacitor, SM Tantalum; Body 3.2 x 1.6 mm (LxW typ)"
  rect 2x1.2 smd: 1(-1.4,0) 2(1.4,0)
  silkscreen extent -2.67,-0.9 1.7,0.9
BGA11C50P3X4_144X194X72 [mm]
  round 0.302 smd: A2(0,0.75) A3(0.5,0.75) B1(-0.5,0.25) B2(0,0.25) B3(0.5,0.25) C1(-0.5,-0.25) C2(0,-0.25) C3(0.5,-0.25) D1(-0.5,-0.75) D2(0,-0.75) D3(0.5,-0.75)
  silkscreen extent -1.1,-1.25 1,1.35, body extent -0.72,-0.97 0.72,0.97, height 0.71
BGA30C40P5X6_225X259X60 [mm]
  round 0.208 smd: A1(-0.8,1) A2(-0.4,1) A3(0,1) A4(0.4,1) A5(0.8,1) B1(-0.8,0.6) B2(-0.4,0.6) B3(0,0.6) B4(0.4,0.6) B5(0.8,0.6) C1(-0.8,0.2) C2(-0.4,0.2) C4(0.4,0.2) C5(0.8,0.2) D2(-0.4,-0.2) D4(0.4,-0.2) D5(0.8,-0.2) E1(-0.8,-0.6) E5(0.8,-0.6) F4(0.4,-1) F5(0.8,-1)
  silkscreen extent -1.35,-1.45 1.25,1.55, body extent -1.12,-1.29 1.13,1.3, height 0.6
C1210_L [mm] "Chip Capacitor, Body 3.2x2.5mm, IPC High Density"
  rect 1.1x2.6 smd: 1(-1.35,0) 2(1.35,0)
  silkscreen extent -0.4,-1.2 0.4,1.2, body extent -1.7,-1.35 1.7,1.35, height 1.5
"CAP - 0402" [mm]
  rect 0.5x0.6 smd: 1(-0.009,0) 2(0.991,0)
  body extent 0,-0.25 1,0.25, height 0.56
"CAP - 0805" [mm]
  rect 0.7x1.3 smd: 1(0.009,-0.026) 2(1.909,-0.026)
  body extent -0.05,-0.63 1.95,0.57, height 0.88
"CAP - 1206" [mm]
  rect 0.9x1.6 smd: 1(-0.026,0.013) 2(2.874,0.013)
  body extent -0.18,-0.79 3.02,0.81, height 1.52
DF30FC40DS04V82 [mm]
  rect 0.23x0.7 smd: 1(-3.8,-2.08) 2(-3.8,2.08) 3(-3.4,-2.08) 4(-3.4,2.08) 5(-3,-2.08) 6(-3,2.08) 7(-2.6,-2.08) 8(-2.6,2.08) 9(-2.2,-2.08) 10(-2.2,2.08) 11(-1.8,-2.08) 12(-1.8,2.08) 13(-1.4,-2.08) 14(-1.4,2.08) 15(-1,-2.08) 16(-1,2.08) 17(-0.6,-2.08) 18(-0.6,2.08) 19(-0.2,-2.08) 20(-0.2,2.08) 21(0.2,-2.08) 22(0.2,2.08) 23(0.6,-2.08) 24(0.6,2.08) 25(1,-2.08) 26(1,2.08) 27(1.4,-2.08) 28(1.4,2.08) 29(1.8,-2.08) 30(1.8,2.08) 31(2.2,-2.08) 32(2.2,2.08) 33(2.6,-2.08) 34(2.6,2.08) 35(3,-2.08) 36(3,2.08) 37(3.4,-2.08) 38(3.4,2.08) 39(3.8,-2.08) 40(3.8,2.08)
  silkscreen extent -5.11,-1.88 5.11,1.88, body extent -5.1,-2.28 5.12,2.28, height 0.9
DO-216AA [mm]
  rect 1.38x0.75 smd mask+0: 1(0.178,0)
  rect 1.38x0.75 smd: 2(3.06,0)
  Top Layer region: -0.66,0.546 -0.66,-0.546 -0.165,-0.546 -0.165,-1.016 1.664,-1.016 1.664,1.016 -0.165,1.016 -0.165,0.546
  silkscreen extent 1.9,-0.95 4.33,0.95
FH12-24S-0.5SH [mm] "Connector; FH12 Series; 24 Position; 0.5mm Spaced Bottom Contact"
  rect 0.3x1.3 smd: 1(-5.75,1.625) 2(-5.25,1.625) 3(-4.75,1.625) 4(-4.25,1.625) 5(-3.75,1.625) 6(-3.25,1.625) 7(-2.75,1.625) 8(-2.25,1.625) 9(-1.75,1.625) 10(-1.25,1.625) 11(-0.75,1.625) 12(-0.25,1.625) 13(0.25,1.625) 14(0.75,1.625) 15(1.25,1.625) 16(1.75,1.625) 17(2.25,1.625) 18(2.75,1.625) 19(3.25,1.625) 20(3.75,1.625) 21(4.25,1.625) 22(4.75,1.625) 23(5.25,1.625) 24(5.75,1.625)
  rect 1.8x2.2 smd: 25(-7.65,-1.625) 26(7.65,-1.625)
  silkscreen extent -7.55,-4.62 7.55,1.75
FH1210S05SH198 [mm]
  rect 0.3x1.3 smd: 1(-2.25,2.8) 2(-1.75,2.8) 3(-1.25,2.8) 4(-0.75,2.8) 5(-0.25,2.8) 6(0.25,2.8) 7(0.75,2.8) 8(1.25,2.8) 9(1.75,2.8) 10(2.25,2.8)
  rect 1.8x2.2 smd: 11(-4.15,-0.45) 12(4.15,-0.45)
  silkscreen extent -4.05,-3.45 4.05,2.15, body extent -4.55,-3.43 4.55,2.97, height 2.04
INDC2928X203N [mm]
  rect 1x2.95 smd: 1(-1.4,0) 2(1.4,0)
  silkscreen extent 0,-1.3 0,1.3, body extent -1.46,-1.4 1.46,1.4, height 2.03
INDPM4532X280N [mm]
  rect 1.95x2.65 smd: 1(-1.95,0) 2(1.95,0)
  silkscreen extent -2.25,-1.6 2.25,1.6, body extent -2.25,-1.6 2.25,1.6, height 2.8
LEDC1608X55N [mm]
  rect 0.7x0.95 smd: 1(-0.9,0) 2(0.9,0)
  silkscreen extent -1.6,-0.83 0.9,0.83
MICT-B5-90 [mm] "BGA, 90-Balls, Body 13x8mm, Pitch 0.8mm"
  round 0.4 smd: A1(-3.2,5.6) A2(-2.4,5.6) A3(-1.6,5.6) A7(1.6,5.6) A8(2.4,5.6) A9(3.2,5.6) B1(-3.2,4.8) B2(-2.4,4.8) B3(-1.6,4.8) B7(1.6,4.8) B8(2.4,4.8) B9(3.2,4.8) C1(-3.2,4) C2(-2.4,4) C3(-1.6,4) C7(1.6,4) C8(2.4,4) C9(3.2,4) D1(-3.2,3.2) D2(-2.4,3.2) D3(-1.6,3.2) D7(1.6,3.2) D8(2.4,3.2) D9(3.2,3.2) E1(-3.2,2.4) E2(-2.4,2.4) E3(-1.6,2.4) E7(1.6,2.4) E8(2.4,2.4) E9(3.2,2.4) F1(-3.2,1.6) F2(-2.4,1.6) F3(-1.6,1.6) F7(1.6,1.6) F8(2.4,1.6) F9(3.2,1.6) G1(-3.2,0.8) G2(-2.4,0.8) G3(-1.6,0.8) G7(1.6,0.8) G8(2.4,0.8) G9(3.2,0.8) H1(-3.2,0) H2(-2.4,0) H3(-1.6,0) H7(1.6,0) H8(2.4,0) H9(3.2,0) J1(-3.2,-0.8) J2(-2.4,-0.8) J3(-1.6,-0.8) J7(1.6,-0.8) J8(2.4,-0.8) J9(3.2,-0.8) K1(-3.2,-1.6) K2(-2.4,-1.6) K3(-1.6,-1.6) K7(1.6,-1.6) K8(2.4,-1.6) K9(3.2,-1.6) L1(-3.2,-2.4) L2(-2.4,-2.4) L3(-1.6,-2.4) L7(1.6,-2.4) L8(2.4,-2.4) L9(3.2,-2.4) M1(-3.2,-3.2) M2(-2.4,-3.2) M3(-1.6,-3.2) M7(1.6,-3.2) M8(2.4,-3.2) M9(3.2,-3.2) N1(-3.2,-4) N2(-2.4,-4) N3(-1.6,-4) N7(1.6,-4) N8(2.4,-4) N9(3.2,-4) P1(-3.2,-4.8) P2(-2.4,-4.8) P3(-1.6,-4.8) P7(1.6,-4.8) P8(2.4,-4.8) P9(3.2,-4.8) R1(-3.2,-5.6) R2(-2.4,-5.6) R3(-1.6,-5.6) R7(1.6,-5.6) R8(2.4,-5.6) R9(3.2,-5.6)
  silkscreen extent -4.77,-6.5 4,6.5, body extent -4,-6.5 4,6.5, height 1
NX3215SA [mm]
  rect 1x1.8 smd: 1(-1.25,0) 2(1.25,0)
  silkscreen extent -0.5,-0.75 0.5,0.75
"PIN HEADER 1p" [mil]
  round 40 all layers, no hole: 1(0,0)
"PIN HEADER 5P 2.54mm" [mm]
  rrect50% 1.7x2.5 hole 1: 1(0,0) 2(2.54,0) 3(5.08,0) 4(7.62,0) 5(10.16,0)
  body extent -1.27,-1.24 11.43,1.25, height 8.54
QFN50P250X250X100-12N-D [mil]
  rect 33.95x11.81 smd: 1(-47,30) 2(-47,10) 3(-47,-10) 4(-47,-30) 7(47,-30) 8(47,-10) 9(47,10) 10(47,30)
  rect 11.81x33.95 smd: 5(-10,-47) 6(10,-47) 11(10,47) 12(-10,47)
  silkscreen extent -69,54 -59,64, body extent -51,-51 51,51, height 39
QFN-8 [mm]
  rect 0.5x0.38 smd: 1(1.5,-0.975) 2(1.5,-0.325) 3(1.5,0.325) 4(1.5,0.975) 5(-1.5,0.975) 6(-1.5,0.325) 7(-1.5,-0.325) 8(-1.5,-0.975)
  rect 1.5x2.3 smd: 9(0,0)
  body extent -1.5,-1.5 1.5,1.5, height 0.9
"RES - 0402" [mm]
  rect 0.5x0.6 smd: 1(0.008,0) 2(1.008,0)
  body extent 0,-0.25 1,0.25, height 0.38
"RES - 0603" [mm]
  rect 0.6x0.9 smd: 1(0,0) 2(1.5,0)
  body extent -0.06,-0.4 1.54,0.4, height 0.5
"RES - 1206" [mm]
  rect 0.9x1.6 smd: 1(0,0) 2(2.9,0)
  body extent -0.15,-0.8 3.05,0.8, height 0.63
RESC3226X100N [mm]
  rect 1.75x2.65 smd: 1(-1.15,0) 2(1.15,0)
  body extent -1.63,-1.28 1.63,1.27, height 1
SKSLLBE010 [mm]
  rect 0.7x0.6 smd: 1(-0.85,0.963) 2(0.85,0.963)
  rect 0.75x1.85 smd: 3(-2.325,-0.162) 4(2.325,-0.162)
  silkscreen extent -2.32,-1.1 2.32,1.1, body extent -2.25,-1.82 2.25,1.18, height 1.64
SOD123 [mil]
  rect 36x48 smd: 1(0,0) 2(129,0)
  silkscreen extent 95,-40 95,40, body extent -8,-31 138,32, height 50
SOD323 [mm]
  rect 0.63x0.83 smd: 1(0,0) 2(2.225,0)
  silkscreen extent 1.52,-1.14 1.52,1.14, body extent -0.16,-0.68 2.44,0.68, height 1.1
SOIC127P790X216-8N [mm]
  rect 1.65x0.7 smd: 1(-3.6,1.905) 2(-3.6,0.635) 3(-3.6,-0.635) 4(-3.6,-1.905) 5(3.6,-1.905) 6(3.6,-0.635) 7(3.6,0.635) 8(3.6,1.905)
  silkscreen extent -4.42,-2.62 2.42,2.62, body extent -3.95,-2.61 3.95,2.62, height 2.16
SOT23 [mm]
  rect 0.8x0.8 smd: 1(-0.9,-2.254) 2(0.9,-2.254) 3(0,0.127)
  body extent -1.5,-2.34 1.5,0.3, height 1.08
SOT95P280X120-5N [mm]
  rect 0.9x0.6 smd: 1(-1.4,0.95) 2(-1.4,0) 3(-1.4,-0.95) 4(1.4,-0.95) 5(1.4,0.95)
  silkscreen extent -1.85,-1.45 0.6,1.5, body extent -1.4,-1.45 1.4,1.45, height 1.2
SOT95P280X145-5N [mm]
  rect 1.15x0.6 smd: 1(-1.25,0.95) 2(-1.25,0) 3(-1.25,-0.95) 4(1.25,-0.95) 5(1.25,0.95)
  silkscreen extent -1.83,-1.48 0.33,1.5, body extent -1.4,-1.47 1.4,1.48, height 1.45
STM-TFBGA216 [mm] "BGA, 216-Balls, Body 13x13mm, Pitch 0.8mm"
  round 0.35 smd: A1(-5.6,5.6) A2(-4.8,5.6) A3(-4,5.6) A4(-3.2,5.6) A5(-2.4,5.6) A6(-1.6,5.6) A7(-0.8,5.6) A8(0,5.6) A9(0.8,5.6) A10(1.6,5.6) A11(2.4,5.6) A12(3.2,5.6) A13(4,5.6) A14(4.8,5.6) A15(5.6,5.6) B1(-5.6,4.8) B2(-4.8,4.8) B3(-4,4.8) B4(-3.2,4.8) B5(-2.4,4.8) B6(-1.6,4.8) B7(-0.8,4.8) B8(0,4.8) B9(0.8,4.8) B10(1.6,4.8) B11(2.4,4.8) B12(3.2,4.8) B13(4,4.8) B14(4.8,4.8) B15(5.6,4.8) C1(-5.6,4) C2(-4.8,4) C3(-4,4) C4(-3.2,4) C5(-2.4,4) C6(-1.6,4) C7(-0.8,4) C8(0,4) C9(0.8,4) C10(1.6,4) C11(2.4,4) C12(3.2,4) C13(4,4) C14(4.8,4) C15(5.6,4) D1(-5.6,3.2) D2(-4.8,3.2) D3(-4,3.2) D4(-3.2,3.2) D5(-2.4,3.2) D6(-1.6,3.2) D7(-0.8,3.2) D8(0,3.2) D9(0.8,3.2) D10(1.6,3.2) D11(2.4,3.2) D12(3.2,3.2) D13(4,3.2) D14(4.8,3.2) D15(5.6,3.2) E1(-5.6,2.4) E2(-4.8,2.4) E3(-4,2.4) E4(-3.2,2.4) E5(-2.4,2.4) E6(-1.6,2.4) E7(-0.8,2.4) E8(0,2.4) E9(0.8,2.4) E10(1.6,2.4) E11(2.4,2.4) E12(3.2,2.4) E13(4,2.4) E14(4.8,2.4) E15(5.6,2.4) F1(-5.6,1.6) F2(-4.8,1.6) F3(-4,1.6) F4(-3.2,1.6) F5(-2.4,1.6) F6(-1.6,1.6) F7(-0.8,1.6) F8(0,1.6) F9(0.8,1.6) F10(1.6,1.6) F11(2.4,1.6) F12(3.2,1.6) F13(4,1.6) F14(4.8,1.6) F15(5.6,1.6) G1(-5.6,0.8) G2(-4.8,0.8) G3(-4,0.8) G4(-3.2,0.8) G5(-2.4,0.8) G6(-1.6,0.8) G10(1.6,0.8) G11(2.4,0.8) G12(3.2,0.8) G13(4,0.8) G14(4.8,0.8) G15(5.6,0.8) H1(-5.6,0) H2(-4.8,0) H3(-4,0) H4(-3.2,0) H5(-2.4,0) H6(-1.6,0) H10(1.6,0) H11(2.4,0) H12(3.2,0) H13(4,0) H14(4.8,0) H15(5.6,0) J1(-5.6,-0.8) J2(-4.8,-0.8) J3(-4,-0.8) J4(-3.2,-0.8) J5(-2.4,-0.8) J6(-1.6,-0.8) J10(1.6,-0.8) J11(2.4,-0.8) J12(3.2,-0.8) J13(4,-0.8) J14(4.8,-0.8) J15(5.6,-0.8) K1(-5.6,-1.6) K2(-4.8,-1.6) K3(-4,-1.6) K4(-3.2,-1.6) K5(-2.4,-1.6) K6(-1.6,-1.6) K7(-0.8,-1.6) K8(0,-1.6) K9(0.8,-1.6) K10(1.6,-1.6) K11(2.4,-1.6) K12(3.2,-1.6) K13(4,-1.6) K14(4.8,-1.6) K15(5.6,-1.6) L1(-5.6,-2.4) L2(-4.8,-2.4) L3(-4,-2.4) L4(-3.2,-2.4) L5(-2.4,-2.4) L6(-1.6,-2.4) L7(-0.8,-2.4) L8(0,-2.4) L9(0.8,-2.4) L10(1.6,-2.4) L11(2.4,-2.4) L12(3.2,-2.4) L13(4,-2.4) L14(4.8,-2.4) L15(5.6,-2.4) M1(-5.6,-3.2) M2(-4.8,-3.2) M3(-4,-3.2) M4(-3.2,-3.2) M5(-2.4,-3.2) M6(-1.6,-3.2) M7(-0.8,-3.2) M8(0,-3.2) M9(0.8,-3.2) M10(1.6,-3.2) M11(2.4,-3.2) M12(3.2,-3.2) M13(4,-3.2) M14(4.8,-3.2) M15(5.6,-3.2) N1(-5.6,-4) N2(-4.8,-4) N3(-4,-4) N4(-3.2,-4) N5(-2.4,-4) N6(-1.6,-4) N7(-0.8,-4) N8(0,-4) N9(0.8,-4) N10(1.6,-4) N11(2.4,-4) N12(3.2,-4) N13(4,-4) N14(4.8,-4) N15(5.6,-4) P1(-5.6,-4.8) P2(-4.8,-4.8) P3(-4,-4.8) P4(-3.2,-4.8) P5(-2.4,-4.8) P6(-1.6,-4.8) P7(-0.8,-4.8) P8(0,-4.8) P9(0.8,-4.8) P10(1.6,-4.8) P11(2.4,-4.8) P12(3.2,-4.8) P13(4,-4.8) P14(4.8,-4.8) P15(5.6,-4.8) R1(-5.6,-5.6) R2(-4.8,-5.6) R3(-4,-5.6) R4(-3.2,-5.6) R5(-2.4,-5.6) R6(-1.6,-5.6) R7(-0.8,-5.6) R8(0,-5.6) R9(0.8,-5.6) R10(1.6,-5.6) R11(2.4,-5.6) R12(3.2,-5.6) R13(4,-5.6) R14(4.8,-5.6) R15(5.6,-5.6)
  silkscreen extent -7.27,-6.5 6.5,6.5, body extent -6.5,-6.5 6.5,6.5, height 1.1

## Part data
Bat: "MOLEX - 202656-0021 - PLUG HOUSING, 2POS, NYLON, BLACK"
BB1: "Switching Voltage Regulators Tiny Single Ind Buck Boost Convter"
BTN: "Black Button Tactile Switch, SPST-NO 50 mA 0.5mm Surface Mount"
C1 C2 C3 C4 C5 C14 C15 C16 C17 C18 C19 C20 C21 C22 C23: library part capacitor
C6 C53 C54 C63 C64 C66 C67 C68 C69 C70 C71 C72 C73 C74 C75 C79 C83 C84 C85 C88 C89 C90 C91 C92 C93 C94 C95 C97: library part CAP, "Capacitor"
C24 C56 C60 C61 C65 C80 C82 C86 C98: library part "Cap Pol1", "Polarized Capacitor (Radial)"
C42 C43 C44 C45 C46 C47 C48 C49 C50 C51 C52 C55 C57 C58 C59 C62 C76 C77 C78 C81 C87 C96: library part Cap, "Capacitor"
CN2: "FFC & FPC Connectors 10P SMT HORIZONTAL .5MM PITCH"
CN3: "Hirose DF30 Series 0.4mm 40 Way 2 Row Straight PCB Socket Surface Mount Board to Board, Board to FPC"
CN4: "MOLEX - 47346-1001 - MULTIPOLE CONNECTOR"
CN10: "FH12 Series, \"Flip-Lock\" SMT/ZIF FFC/FPC Connector - 0.5mm Spaced Bottom Contact"
D5: "New STMicroelectronics EMIF02-USB03F2 EMI Filter & ESD Protector"
L1 L2 L4 L5 L6 L7: library part Inductor, "Inductor"
L3: library part LQH43CN100K03L, "587-3550-1-ND"
LD1: library part LED2, "Typical RED, GREEN, YELLOW, AMBER GaAs LED"
R1 R3 R4 R5 R6 R7 R8 R22 R31 Rdiv1 Rdiv2 Rpre Rset: library part resistor
R2 R10 R18 R24 R25 R34 R36 R58 R59 R118 R122 R123 R131 R132 R133 R140 R142 R149 R159 R160 R161: library part Res1, "Resistor"
R19: library part res1, "Resistor"
R55: library part Res_10K_1%_0402, "Resistor"
STBC: "STMICROELECTRONICS - STBC03JR - BATTERY CHARGER, LI-ION/POL, FLIPCHIP-30"
TP8 TP9: library part TestPin
U1: "2MHz, 600mA Step-Down DC-DC Converter"
U2: library part XC6210B302MR-G, "LDO Voltage Regulators 700mA High Speed Votage Regulator"
U4: library part MT48LC4M32B2B5
U5: "Macronix MX25L12835FM2I-10G 128Mbit Flash Memory; 3V, SOP, 8-Pin"
U13: library part STLD40DPMR
U14: library part Manta_Dragon_TFBGA216
X2: library part XTAL_8M_NX3225GD, "Crystal 8Mhz, 8pF, -+50PPM, SMD"
X3: library part XTAL_32K_NX3215SA, "Crystal 32.768kHz, 6pF, -+20PPM, R=50K, SMD"
Z1: library part "D Schottky", "Schottky Diode"

## Via types
v1: diameter 16, hole 4, Top Layer to Bottom Layer, 457 vias

## Nets (pads, with @x,y where several pads share a name; then routed paths per layer and width w, separated by ;. In a path a pad name is that pad's centre, name@x,y a point inside that pad or via, vN(x,y) a via of type N, cw(c..) or ccw(c..) an arc to the next point about the centre after c; other vN are vias at no path point)
+1.5V: C19.2 CN3.36 L3.2 U1.5 | length 544.8
  Top Layer w8: CN3.36@110.04,858.27 v1(144.68,858.27)
  Top Layer w12: v1(314.96,929.13) 315.57,929.75 C19.2@350.39,929.75
  Top Layer w20: C19.2@350.39,929.75 U1.5@350.39,993.11 350.39,1028.54 373.03,1051.18 438.98,1051.18 458.66,1070.87 L3.2@458.66,1121.06
  Bottom Layer w12: v1(144.68,858.27) 215.55,929.13 v1(314.96,929.13)
+2.8V: C15.1 C16.1 C20.1 CN3.4 CN3.8 CN3.38 U2.5 | length 664.4
  Top Layer w8: C15.1@53.15,638.17 78.74,638.17 ; C20.1@53.15,876.35 55.49,874.02 CN3.38@110.04,874.02 ; CN3.4@110.04,606.3 89.57,606.3 78.74,617.13 78.74,638.17 ; CN3.8@110.04,637.8 109.67,638.17 78.74,638.17
  Top Layer w15: v1(52.17,660.43) 52.17,639.15 C15.1@53.15,638.17 ; C20.1@53.15,876.35 v1(53.15,895.3) 107.65,949.8 148.62,949.8 158.46,959.65 U2.5@158.46,986.22 215.18,986.22 C16.1@215.55,985.85
  Bottom Layer w15: v1(52.17,660.43) 53.15,661.42 v1(53.15,895.3)
+3V3: BB1.4 BB1.5 BB1.10 C2.1 C5.1 C6.2 C17.1 C18.2 C42.1 C43.1 C44.1 C45.1 C46.1 C47.1 C48.1 C49.1 C50.1 C51.1 C52.1 C53.1 C54.1 C57.1 C58.1 C59.1 C60.1 C62.1 C67.1 C68.1 C69.1 C70.1 C71.1 C72.1 C73.1 C74.1 C75.1 C82.1 C84.1 C88.1 C89.1 C90.1 C91.1 C92.1 C95.1 C97.2 C98.1 CN2.1 CN10.5 CN10.6 L1.1 L5.1 L7.2 LD1.1 R1.1 R3.2 R4.2 R6.2 R10.2 R24.1 R25.1 R34.1 R36.1 R55.2 R118.2 R140.1 R142.1 R149.2 TP9.1 U1.1 U1.3 U2.3 U4.A7 U4.B2 U4.B7 U4.C9 U4.D9 U4.E1 U4.F9 U4.L1 U4.L7 U4.M9 U4.N9 U4.P2 U4.P7 U4.R7 U5.8 U14.C1 U14.E7 U14.E8 U14.E9 U14.E10 U14.F4 U14.F5 U14.F11 U14.G5 U14.G11 U14.H5 U14.H11 U14.J5 U14.J11 U14.K5 U14.K11 U14.L7 U14.L8 U14.L9 U14.L10 | length 6030.4
  Top Layer w4: v1(1023.87,1134.37) 1041.62,1134.37 U14.L8@1046.14,1138.89 U14.L9@1068.42,1161.17 U14.L10@1090.69,1183.44
  Top Layer w5: U14.J5@934.79,1116.63 951.29,1116.63 v1(954.72,1113.19) 957.06,1110.85 U14.K5@957.06,1094.35 ; U4.L7@936.02,395.67 936.02,405.42 952.15,421.55 952.15,443.29 U4.M9@967.52,458.66 ; 1045.89,396.04 1046.26,395.67
  Top Layer w10: CN2.1@256.89,1912.4 256.89,1995.69 C6.2@257.26,1996.06 257.26,2020.06 v1(257.87,2020.67) ; C68.1@583.66,1173.6 584.28,1174.21 604.33,1174.21 635.38,1143.17 694.08,1143.17 U14.C1@712.08,1161.17
  Top Layer w12: C5.1@1235.24,2152.19 1235.24,2130.91 v1(1243.52,2122.62) 1251.81,2114.33 BB1.5@1292.57,2114.33 ; C67.1@1239.9,872.77 1239.9,871.85 C53.1@1274.87,836.88 1291.82,819.92 v1(1363.26,819.92) ; C70.1@1302.89,935.76 1304.4,935.76 1323.77,916.38 v1(1363.26,916.38) ; BB1.4@1309.57,2151.33 1309.57,2201.67 C2.1@1309.67,2201.77 ; C71.1@1314.24,1090.81 1314.24,1081.43 1333.66,1062.01 1357.81,1062.01 C91.1@1363.45,1056.36 1367.13,1052.69 v1(1367.13,1032.48) ; BB1.10@1369.57,2057.33 1395.91,2057.33 1403.61,2065.03 v1(1403.61,2069) ; CN10.5@3019.68,1941.93 3019.68,1970.47 3037.4,1988.19 3098.43,1988.19 3111.22,2000.98 v1(3147.64,2000.98) ; CN10.6@3039.37,1941.93 3039.37,1979.33
  Top Layer w13.78: v1(711.61,1185.04) 712.08,1184.58 U14.C1@712.08,1161.17 ; U14.F4@845.7,1161.17 855.45,1161.17 ; U14.F5@867.97,1183.44 877.72,1183.44 ; U14.G5@890.25,1161.17 899.99,1161.17 ; U14.E7@890.25,1250.25 899.99,1250.25 ; 934.79,1285.05 U14.E9@934.79,1294.79 ; 1001.6,1307.32 U14.F11@1001.6,1317.06 ; U14.L7@1023.87,1116.62 1023.87,1126.37 ; 1023.87,1285.05 U14.G11@1023.87,1294.79 ; 1058.67,1250.25 U14.J11@1068.41,1250.25 ; R10.2@1139.76,36.42 v1(1139.76,62.01)
  Top Layer w15: v1(30.51,1116.14) C17.1@30.51,1095.84 83.05,1095.84 U2.3@83.66,1096.46 ; R142.1@212.29,1996.07 C6.2@257.26,1996.06 ; v1(274.61,1058.07) 275.59,1059.06 U1.3@275.59,1091.54 278.54,1094.49 L7.2@278.54,1143.7 ; U1.1@350.39,1091.54 349.41,1092.52 349.41,1116.14 361.83,1128.57 C18.2@361.83,1144.69 v1(380.91,1144.69) ; v1@423.26,283.46 C50.1@457.31,283.46 ; v1(423.23,374.02) C43.1@457.31,374.02 ; C57.1@536.42,62.62 C46.1@608.27,62.62 608.64,62.99 v1(639.76,62.99) ; v1(537.4,1648.62) 538.02,1648.01 C75.1@561.02,1648.01 660.13,1648.01 R55.2@660.44,1648.31 R140.1@721.45,1648.31 R3.2@773.63,1648.31 ; v1(552.17,1500) 552.69,1500 C95.1@571.13,1481.56 C88.1@599.15,1509.58 639.64,1469.09 644.29,1469.09 624.02,1448.82 645.67,1427.17 645.67,1384.05 C60.1@664.96,1364.76 ; R25.1@565.27,814.22 R24.1@565.27,855.31 561.95,851.99 C54.1@499.02,851.99 499.02,657.48 506.89,649.61 591.54,649.61 ; C44.1@594.49,600.76 634.47,600.76 647.64,587.6 ; R6.2@604.64,690.94 604.64,662.71 591.54,649.61 ; v1(621.06,375) U4.A7@621.06,395.67 U4.B7@652.56,395.67 ; v1(639.8,249.03) 640.45,249.68 641.06,249.68 U4.B2@652.56,238.19 ; v1(651.57,633.86) 649.61,635.83 605.31,635.83 591.54,649.61 ; v1(679.13,41.34) 680.12,42.32 C59.1@680.12,62.62 ; C51.1@685.04,600.76 684.43,601.38 661.42,601.38 647.64,587.6 ; v1(727.4,445.89) 727.4,446.82 U4.D9@715.55,458.66 U4.C9@684.06,458.66 647.64,495.08 647.64,587.6 ; U4.E1@747.05,206.69 726.38,186.02 v1(726.38,75.79) 740.16,62.01 756.28,62.01 C58.1@756.89,62.62 ; U5.8@772.64,2162.6 879.75,2162.6 C62.1@879.92,2162.77 901.94,2162.77 v1(902.56,2163.39) ; v1(776.57,506.89) 778.54,504.92 U4.F9@778.54,458.66 ; C52.1@776.57,600.76 795.65,600.76 796.26,601.38 801.22,596.42 v1(801.22,581.72) ; v1(777.6,733.3) 778,732.9 C74.1@801.18,732.9 C89.1@841.54,732.9 ; R149.2@840.55,877.64 858.58,877.64 861.26,874.96 v1(861.26,870.12) ; 855.45,1161.17 867.97,1173.69 U14.F5@867.97,1183.44 ; v1@877.72,1183.44 v1(885.72,1183.44) 885.72,1165.69 U14.G5@890.25,1161.17 ; v1(888.82,1684.14) 875.99,1671.3 R4.2@875.99,1648.31 876.29,1648.01 995.69,1648.01 1013.11,1630.6 R34.1@1015.74,1630.6 ; 899.99,1161.17 907.99,1161.17 912.52,1156.64 U14.H5@912.52,1138.9 ; v1@899.99,1250.25 v1(907.99,1250.25) ; C49.1@910.43,62.62 935.65,62.62 947.83,74.8 947.83,144.68 v1(935.04,157.48) 936.02,158.46 U4.L1@936.02,206.69 ; U14.E8@912.52,1272.52 930.26,1272.52 v1(934.79,1277.05) v1@934.79,1285.05 ; U14.E9@934.79,1294.79 U14.E10@957.06,1317.06 ; U4.M9@967.52,458.66 U4.N9@999.02,458.66 999.02,476.35 1010.33,487.67 1010.33,490.77 1037.4,517.84 1037.4,593.5 1030.14,600.76 C47.1@1009.84,600.76 1009.84,618.11 992.35,635.6 ; v1(972.93,635.6) 992.35,635.6 ; v1(1001.6,1299.32) v1@1001.6,1307.32 ; C48.1@1006.89,62.62 1032.16,62.62 v1(1032.53,63) ; v1@1023.87,1126.37 v1(1023.87,1134.37) ; v1@1023.87,1285.05 v1(1023.87,1277.05) 1041.62,1277.05 U14.H11@1046.14,1272.52 1046.14,1254.78 1050.67,1250.25 1058.67,1250.25 ; U4.P2@1030.51,238.19 1046.31,222.39 v1(1046.31,221.47) ; U4.P7@1030.51,395.67 1046.26,395.67 U4.R7@1062.01,395.67 1070.63,387.05 1070.63,380.91 v1(1070.13,380.41) ; L5.1@1040.35,652.56 L5.1@1038.39,654.53 1011.28,654.53 992.35,635.6 ; v1(1065.94,916.34) 1067.45,916.34 C92.1@1094.75,889.04 ; U14.J11@1068.41,1250.25 1068.41,1248.06 1088.49,1227.98 U14.K11@1090.69,1227.98 ; v1(1106.35,1539.45) 1106.35,1554.8 C69.1@1124.02,1572.46 C72.1@1174.21,1572.46 C84.1@1226.38,1572.46 ; v1(1184.11,1539.45) 1184.19,1539.37 R36.1@1215.86,1539.37 ; C42.1@1222.07,269.68 1222.07,302.78 1241.14,321.85 ; C45.1@1222.07,385.83 1222.07,340.92 1241.14,321.85 ; v1(1276.57,322.83) 1242.13,322.83 1241.14,321.85 ; v1(1289.37,2201.77) C2.1@1309.67,2201.77 ; C71.1@1314.24,1090.81 1314.24,1108.53 C73.1@1331.43,1125.72 ; LD1.1@1333.66,1579.73 1366.14,1579.73 v1(1367.13,1578.74) ; v1(1358.27,1439.96) 1366.14,1432.09 TP9.1@1366.14,1414.37 1366.14,1376.3 R118.2@1367.13,1375.31 ; R1.1@1557.09,1993.11 1559.05,1991.14 1583.36,1991.14 v1(1585.63,1988.87)
  Top Layer w20: v1(2294.29,2176.18) L1.1@2334.65,2176.18 ; v1(3147.64,2000.98) 3212.6,2000.98 3225.39,2013.78 3225.39,2049.21 C82.1@3227.36,2051.18 3229.33,2053.15 3229.33,2091.54 3248.03,2110.24 C97.2@3298.6,2110.24
  Internal Signal 2 w15: v1(423.23,374.02) 424.21,375 v1(621.06,375)
  Bottom Layer w15: v1(639.76,62.99) v1(639.8,249.03) ; v1(776.57,506.89) 785.65,515.96 785.65,566.15 v1(801.22,581.72)
  other v1: 423.25,283.48
A: C66.2 C79.1 CN10.3 CN10.4 U13.6 Z1.2 | length 612
  Top Layer w12: C79.1@2759.93,1853.72 2762.8,1856.58 2762.8,1878.94 2770.17,1886.32 2969.98,1886.32 2980.31,1896.65 CN10.3@2980.31,1941.93
  Top Layer w20: C66.2@2689.96,1853.72 C79.1@2759.93,1853.72 ; U13.6@2936.02,2113.19 2971.46,2113.19 2995.67,2088.98 Z1.2@2995.67,2057.09 2995.67,1923.82 2995.08,1923.23 CN10.3@2985.24,1923.23
A0: U4.G8 U14.D2 | length 1063.1
  Top Layer w5: U14.D2@756.62,1161.17 756.62,1170.91 v1(756.62,1178.91) ; U4.G8@810.04,427.17 825.79,442.91 825.79,486.22 870.08,530.51 v1(878.67,530.51)
  Internal Signal 1 w5: v1(878.67,530.51) v1@878.67,535.32
  Internal Signal 2 w5: v1(756.62,1178.91) 696.85,1119.14 696.85,544.29 777.64,463.5 813.92,463.5 878.67,528.25 v1(878.67,530.51)
A1: U4.G9 U14.E2 | length 1040.4
  Top Layer w5: U14.E2@778.89,1138.9 778.89,1148.64 v1(778.89,1156.64) ; U4.G9@810.04,458.66 810.04,501.97 838.58,530.51 v1(847.41,530.51)
  Internal Signal 2 w5: v1(778.89,1156.64) 764.91,1156.64 710.63,1102.36 710.63,648.62 727.36,631.89 727.36,625.57 748.82,625.57 748.82,610.57 727.36,610.57 722.2,610.57 722.2,595.57 727.36,595.57 748.82,595.57 748.82,580.57 727.36,580.57 722.2,580.57 722.2,565.57 727.36,565.57 727.36,558.07 727.36,533.46 773.62,487.2 804.1,487.2 v1(847.41,530.51)
A2: U4.F7 U14.G2 | length 1136.7
  Top Layer w5: U4.F7@778.54,395.67 778.54,376.97 v1(781.5,374.02) ; v1(781.53,1025.64) 777.34,1025.64 823.43,1071.73 U14.G2@823.43,1094.35
  Internal Signal 1 w5: v1(781.5,374.02) 745.08,410.43 745.08,468.5 745.08,476 715.08,476 715.08,491 745.08,491 761.1,491 761.1,506 745.08,506 715.08,506 715.08,521 745.08,521 770.17,521 770.17,536 745.08,536 715.08,536 715.08,551 745.08,551 775.08,551 775.08,566 745.08,566 745.08,575.79 726.38,594.49 726.38,974.41 777.61,1025.64 v1(781.53,1025.64)
A3: U4.F3 U14.H2 | length 1150.4
  Top Layer w5: v1(767.72,303.15) 767.72,280.51 U4.F3@778.54,269.68 ; v1(799.21,985.24) 799.21,1002.95 802.17,1005.91 845.7,1049.46 U14.H2@845.7,1072.08
  Internal Signal 1 w5: v1(767.72,303.15) 767.72,304.01 797.2,333.49 797.35,333.49 798.07,334.22 798.07,417.32 777.56,437.83 777.56,475.39 792.07,489.91 792.07,513.31 785.43,519.95 785.43,576.77 785.43,584.27 758.19,584.27 758.19,599.27 785.43,599.27 806.15,599.27 806.15,614.27 785.43,614.27 758.19,614.27 758.19,629.27 785.43,629.27 806.15,629.27 806.15,644.27 785.43,644.27 758.19,644.27 758.19,659.27 785.43,659.27 806.15,659.27 806.15,674.27 785.43,674.27 785.43,709.65 799.21,723.43 v1(799.21,985.24)
  Internal Signal 2 w5: v1(767.72,303.15) v1@767.72,304.01
A4: U4.G1 U14.J2 | length 1085.8
  Top Layer w5: U4.G1@810.04,206.69 825.41,222.07 825.41,282.48 830.91,287.97 v1(830.91,303.15) ; U14.J2@867.97,1049.81 867.97,1059.56 v1(867.97,1067.56)
  Internal Signal 1 w5: v1(830.91,303.15) 830.91,304.01 846.46,319.56 846.46,467.77 875.51,496.82 876.74,496.82 894.42,514.5 894.42,625.98 894.42,646.83 909.28,646.83 909.28,661.83 894.42,661.83 876.46,661.83 876.46,676.83 894.42,676.83 908.95,676.83 908.95,691.83 894.42,691.83 876.46,691.83 876.46,706.83 894.42,706.83 908.95,706.83 908.95,721.83 894.42,721.83 894.42,729.33 894.42,981.39 867.97,1007.84 v1(867.97,1067.56)
  Internal Signal 2 w5: v1(830.91,303.15) v1@830.91,304.01
A5: U4.G2 U14.K3 | length 1083.5
  Top Layer w5: v1(788.78,303.15) 787.4,301.77 787.4,293.31 794.29,286.42 794.29,253.94 U4.G2@810.04,238.19 ; v1(912.45,1032.53) v1@912.52,1032.6 ; v1@912.52,1027.19 v1@912.52,1032.6 ; U14.K3@912.52,1049.81 v1@912.52,1032.6
  Internal Signal 1 w5: v1(788.78,303.15) 788.78,304.01 803.42,318.65 803.49,318.65 812.91,328.07 812.91,473.67 831.65,492.4 831.65,536.93 818.9,549.68 818.9,697.83 818.9,708.8 853.17,708.8 853.17,723.8 818.9,723.8 818.9,731.3 818.9,918.04 841.33,940.47 841.33,965.45 830.2,976.58 830.2,989.42 838.93,998.14 838.93,1073.18 848.8,1083.06 874.39,1083.06 912.45,1045 v1(912.45,1032.53)
  Internal Signal 2 w5: v1(788.78,303.15) v1@788.78,304.01
A6: U4.G3 U14.M6 | length 1059.8
  Top Layer w5: v1(809.84,303.15) 809.84,269.88 U4.G3@810.04,269.68 ; v1(1001.97,1069.88) 1021.85,1069.88 U14.M6@1023.87,1071.9
  Internal Signal 1 w5: v1(809.84,303.15) 809.84,304.01 827.76,321.92 827.76,467.52 863.17,502.93 863.17,729.33 863.17,738.6 839.92,738.6 839.92,753.6 863.17,753.6 877.68,753.6 877.68,768.6 863.17,768.6 839.92,768.6 839.92,783.6 863.17,783.6 877.67,783.6 877.67,798.6 863.17,798.6 863.17,806.1 863.17,822.81 876.97,836.61 v1(876.97,894.69)
  Internal Signal 2 w5: v1(809.84,303.15) v1@809.84,304.01 ; v1(876.97,894.69) 876.97,895.38 873.38,898.97 959.65,985.24 959.65,1003.68 985.24,1029.27 985.24,1057.09 998.03,1069.88 v1(1001.97,1069.88)
A7: U4.H1 U14.N6 | length 1152.6
  Top Layer w5: v1(841.54,187.99) U4.H1@841.54,206.69 ; U14.N6@1046.14,1049.81 1046.14,1059.56 v1(1046.14,1067.56)
  Internal Signal 1 w5: v1(841.54,187.99) 906.74,253.2 906.74,377.22 994.83,465.3 994.83,591.78 922.24,664.37 922.24,752.95 922.24,765.65 905.42,765.65 905.42,780.65 922.24,780.65 951.25,780.65 951.25,795.65 922.24,795.65 922.24,803.15 922.24,810.04 981.3,869.09 981.3,980.79 1042.92,1042.41 1042.92,1064.33 v1(1046.14,1067.56)
A8: U4.H2 U14.P6 | length 1089.1
  Top Layer w5: U4.H2@841.54,238.19 856.91,253.56 856.91,285.06 851.97,290 v1(851.97,303.15) ; U14.P6@1068.42,1027.54 1068.42,1037.28 v1(1068.42,1045.28)
  Internal Signal 1 w5: v1(851.97,303.15) 851.97,304.01 867.13,319.16 867.13,442.91 925.42,501.21 925.42,582.91 v1(946.85,604.33)
  Internal Signal 2 w5: v1(851.97,303.15) v1@851.97,304.01 ; v1(946.85,604.33) 963.58,604.33 1082.68,723.43 1082.68,791.34 1082.68,803.56 1056.6,803.56 1056.6,818.56 1082.68,818.56 1092.27,818.56 1092.27,833.56 1082.68,833.56 1056.6,833.56 1056.6,848.56 1082.68,848.56 1092.27,848.56 1092.27,863.56 1082.68,863.56 1082.68,871.06 1082.68,901.15 1083.92,902.39 1083.92,944.87 1071.64,957.15 1071.64,1042.06 v1(1068.42,1045.28)
A9: U4.J3 U14.M8 | length 1059.5
  Top Layer w5: U4.J3@873.03,269.68 v1(873.03,303.15) ; U14.M8@1068.42,1116.62 1086.24,1116.62 v1(1087.65,1115.21)
  Internal Signal 1 w5: v1(873.03,303.15) 886.81,316.93 886.81,378.94 956.68,448.81 956.68,571.84 v1(970.47,585.63)
  Internal Signal 2 w5: v1(970.47,585.63) 1106.19,721.34 1106.19,896.65 1106.19,907.38 1093.91,907.38 1093.91,922.38 1106.19,922.38 1127.05,922.38 1127.05,937.38 1106.19,937.38 1106.19,944.88 1106.19,967.85 1097.46,976.58 1097.46,989.42 1108.07,1000.03 1108.07,1036 1098.99,1045.08 1091.24,1045.08 1075.19,1061.14 1075.19,1073.98 1087.65,1086.44 v1(1087.65,1115.21)
A10: U4.G7 U14.N7 | length 1017.7
  Top Layer w5: U4.G7@810.04,395.67 793.92,411.79 772.18,411.79 762.42,421.55 762.42,469.58 757.87,474.12 757.87,520.67 767.72,530.51 v1(816.15,530.51) ; U14.N7@1068.42,1072.08 1068.42,1081.83 v1(1068.42,1089.83)
  Internal Signal 2 w5: v1(816.15,530.51) 816.15,560.24 1016.73,760.83 1016.73,864.85 1025.59,873.71 1025.59,977.11 1008.37,994.32 1008.37,1007.86 1039.37,1038.86 1039.37,1052.16 1018.7,1072.83 1018.7,1106.58 1039.72,1127.6 1052.56,1127.6 1061.64,1118.52 1061.64,1096.6 v1(1068.42,1089.83)
A11: U4.H9 U14.M7 | length 1043.1
  Top Layer w5: U4.H9@841.54,458.66 841.54,484.25 872.3,515.01 885.09,515.01 900.59,530.51 v1(909.92,530.51) ; U14.M7@1046.14,1094.35 1046.14,1104.1 v1(1046.14,1112.1)
  Internal Signal 2 w5: v1(909.92,530.51) 909.92,595.95 969,655.02 971.41,657.44 950.2,678.65 960.8,689.25 982.02,668.04 995.13,654.93 1005.73,665.54 992.62,678.65 971.41,699.86 982.02,710.47 1003.23,689.25 1016.34,676.15 1026.95,686.75 1013.84,699.86 992.62,721.07 1003.23,731.68 1024.44,710.47 1035.05,721.07 1040.35,726.38 1040.35,858.27 1047.24,865.16 1047.24,1002.19 1061.64,1016.59 1061.64,1029.43 1052.92,1038.16 1052.92,1052.41 1061.64,1061.14 1061.64,1074.68 1046.26,1090.06 1046.26,1111.98 v1(1046.14,1112.1)
A14: U4.J7 U14.N12 | length 1053
  Top Layer w5: U4.J7@873.03,395.67 889.15,411.79 889.15,465.03 917.23,493.11 935.04,493.11 v1(972.44,530.51) ; v1(1178.15,1167.32) 1179.77,1168.94 U14.N12@1179.77,1183.44
  Internal Signal 2 w5: v1@972.93,530.02 981.79,538.88 987.09,544.18 981.91,549.36 992.52,559.97 997.7,554.79 1015.04,537.45 1025.65,548.05 1008.31,565.39 1003.13,570.57 1013.73,581.18 1018.91,576 1036.26,558.66 1046.86,569.26 1029.52,586.61 1030.02,587.11 1164.37,721.46 1164.37,997.05 1176.18,1008.86 1176.18,1165.35 v1(1178.15,1167.32)
A15: U4.H8 U14.N11 | length 1064.1
  Top Layer w5: U4.H8@841.54,427.17 857.66,443.29 857.66,480.69 881.98,505.01 915.68,505.01 v1(941.18,530.51) ; v1(1139.76,1161.17) 1147.76,1161.17 U14.N11@1157.5,1161.17
  Internal Signal 2 w5: v1(941.18,530.51) 1137.05,726.38 1137.05,817.91 1137.05,820.06 1151.39,820.06 1151.39,835.06 1137.05,835.06 1119.17,835.06 1119.17,850.06 1137.05,850.06 1151.39,850.06 1151.39,865.06 1137.05,865.06 1119.17,865.06 1119.17,880.06 1137.05,880.06 1151.39,880.06 1151.39,895.06 1137.05,895.06 1137.05,902.56 1137.05,985.17 1150.73,998.85 1150.73,1011.69 1142,1020.42 1142,1127.68 1136.81,1132.87 1136.81,1158.22 v1(1139.76,1161.17)
AGND: C15.2 C16.2 C20.2 C21.2 C22.2 CN3.1 CN3.2 R22.1 U2.2 | length 164.4
  Top Layer w15: U2.2@121.06,1096.46 121.06,1054.13 v1(124.02,1051.18) ; C21.2@175.81,1144.69 175.81,1126.32 178.14,1123.99 v1(178.84,1123.99)
  Bottom Layer w15: v1(124.02,1051.18) 178.84,1106.01 v1(178.84,1123.99)